# Altium PCB POT 10x8.PcbDoc (part 1 of 4)
Units mm, origin at the board's own origin, x right, y up, seen from the top; angles counter-clockwise.
Board outline 152.4 x 101.6 mm, 4 copper layers (Top Layer, Mid Layer 1, Mid Layer 2, Bottom Layer), stack 0.97 mm thick; 324 components, 355 nets, 1533 pads, 300 vias.
Unrouted connection lines stored in the file: 224.
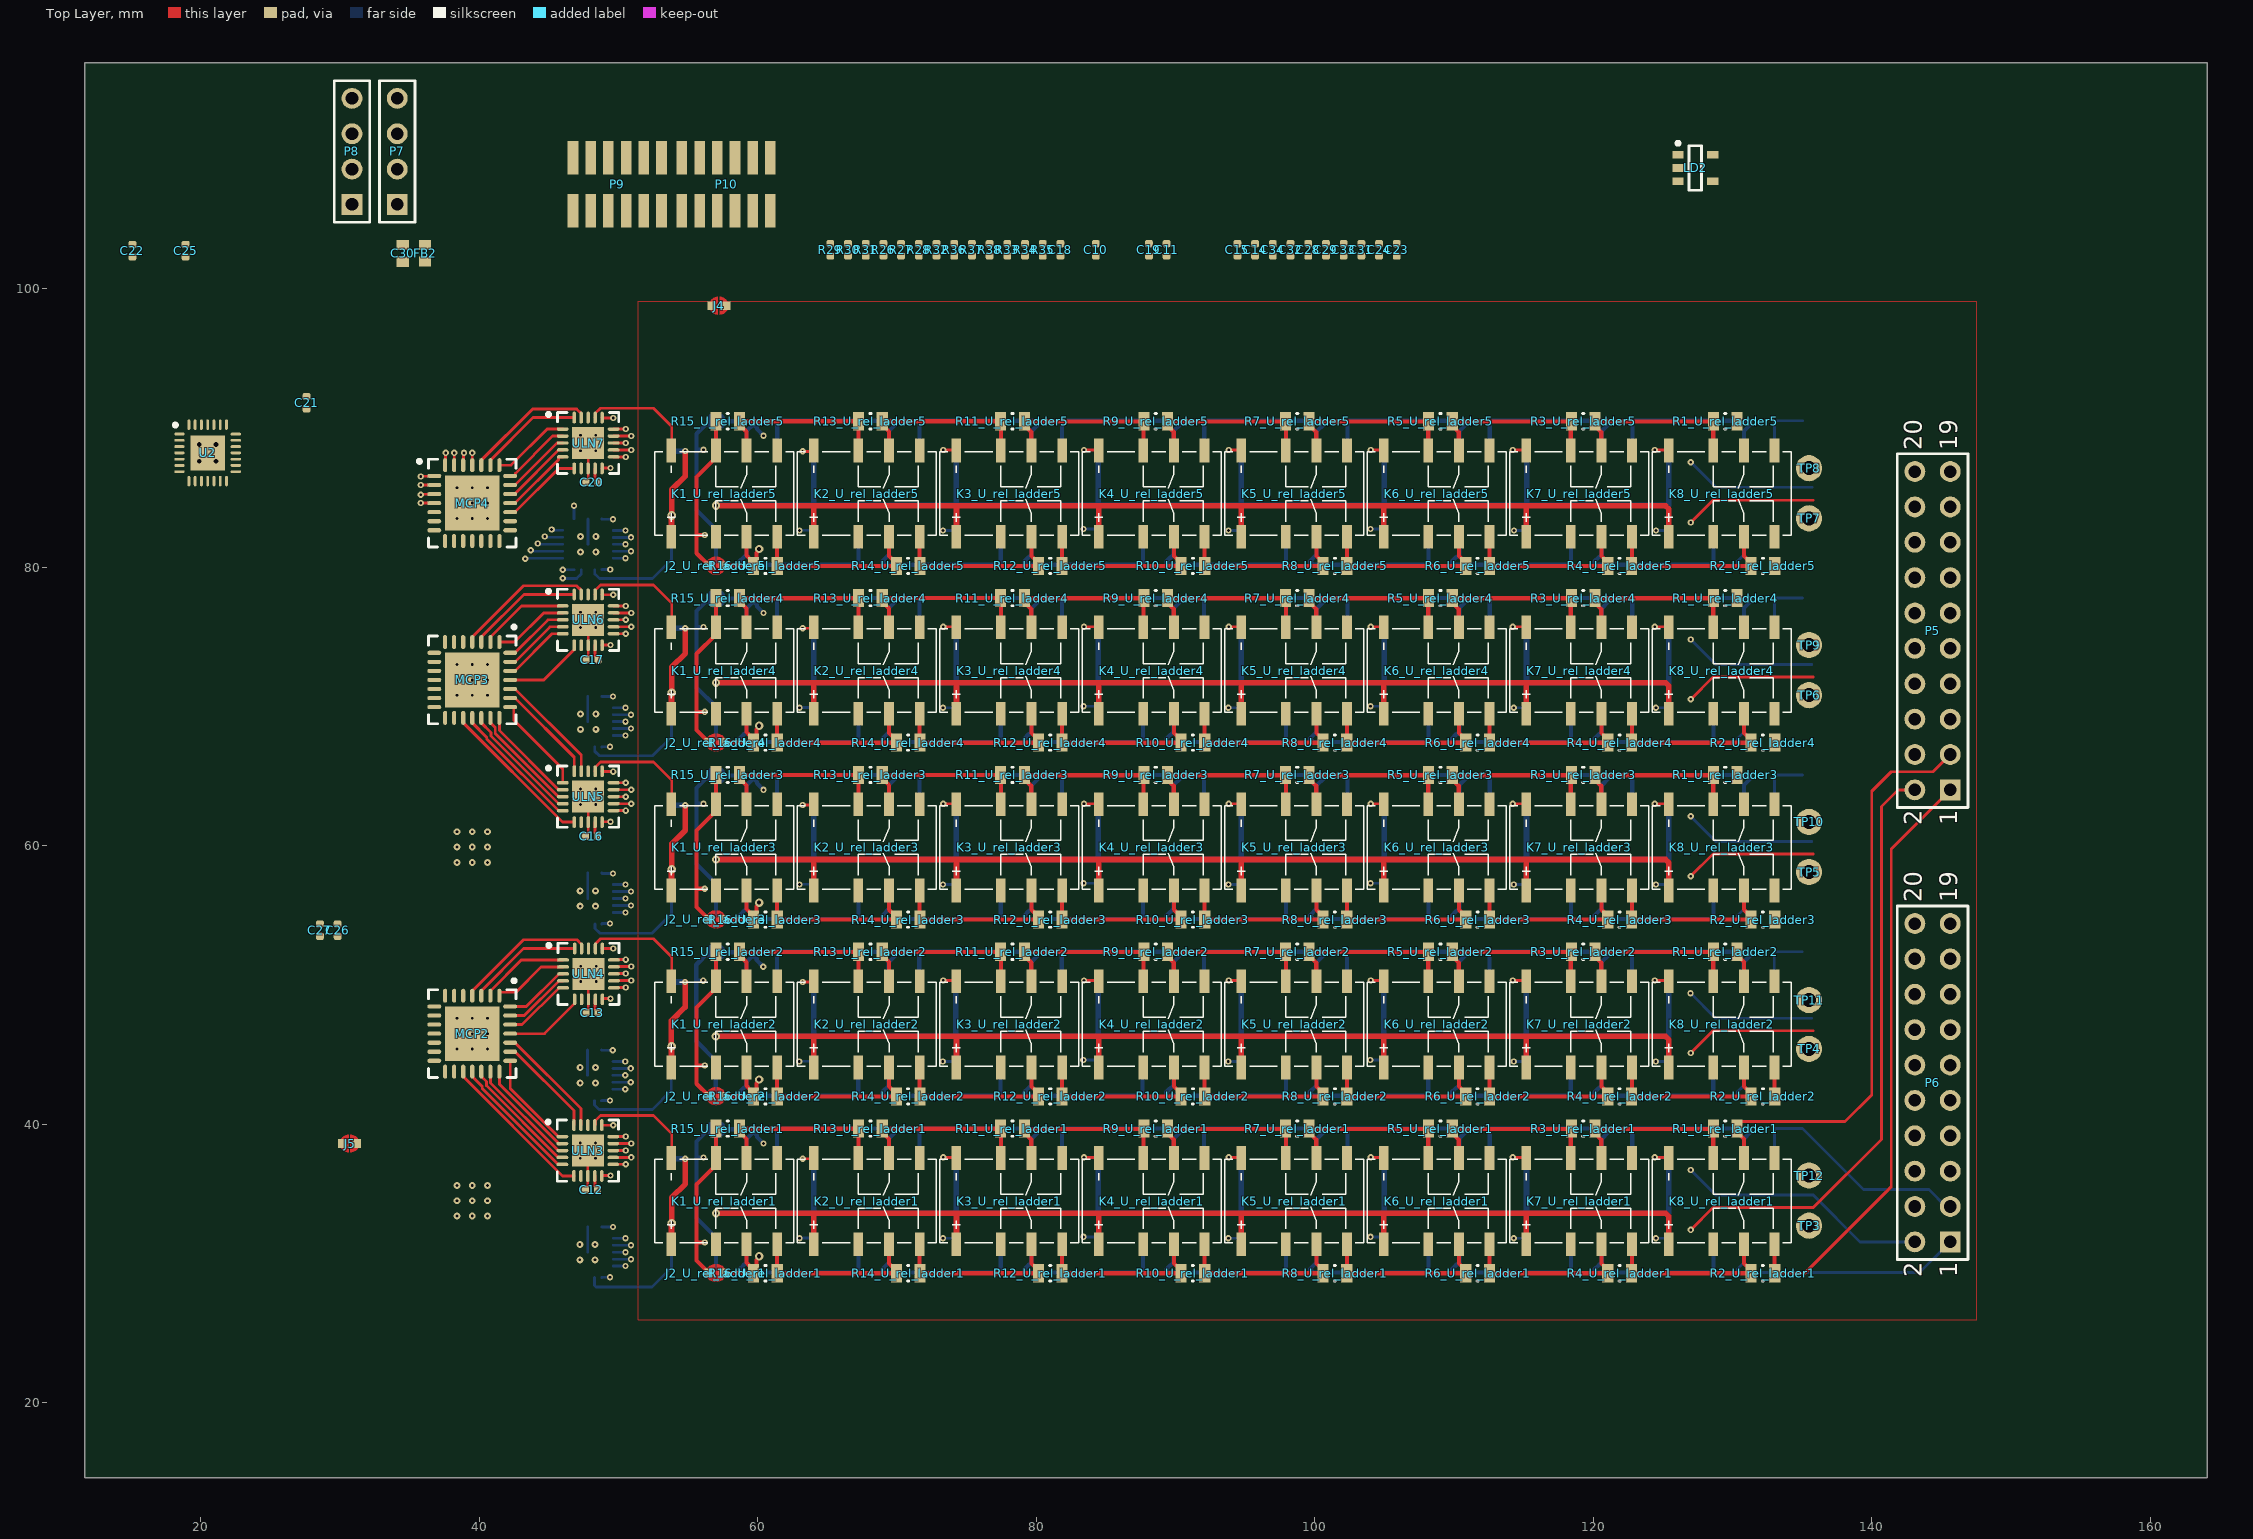
[diagram p0: Top Layer view]
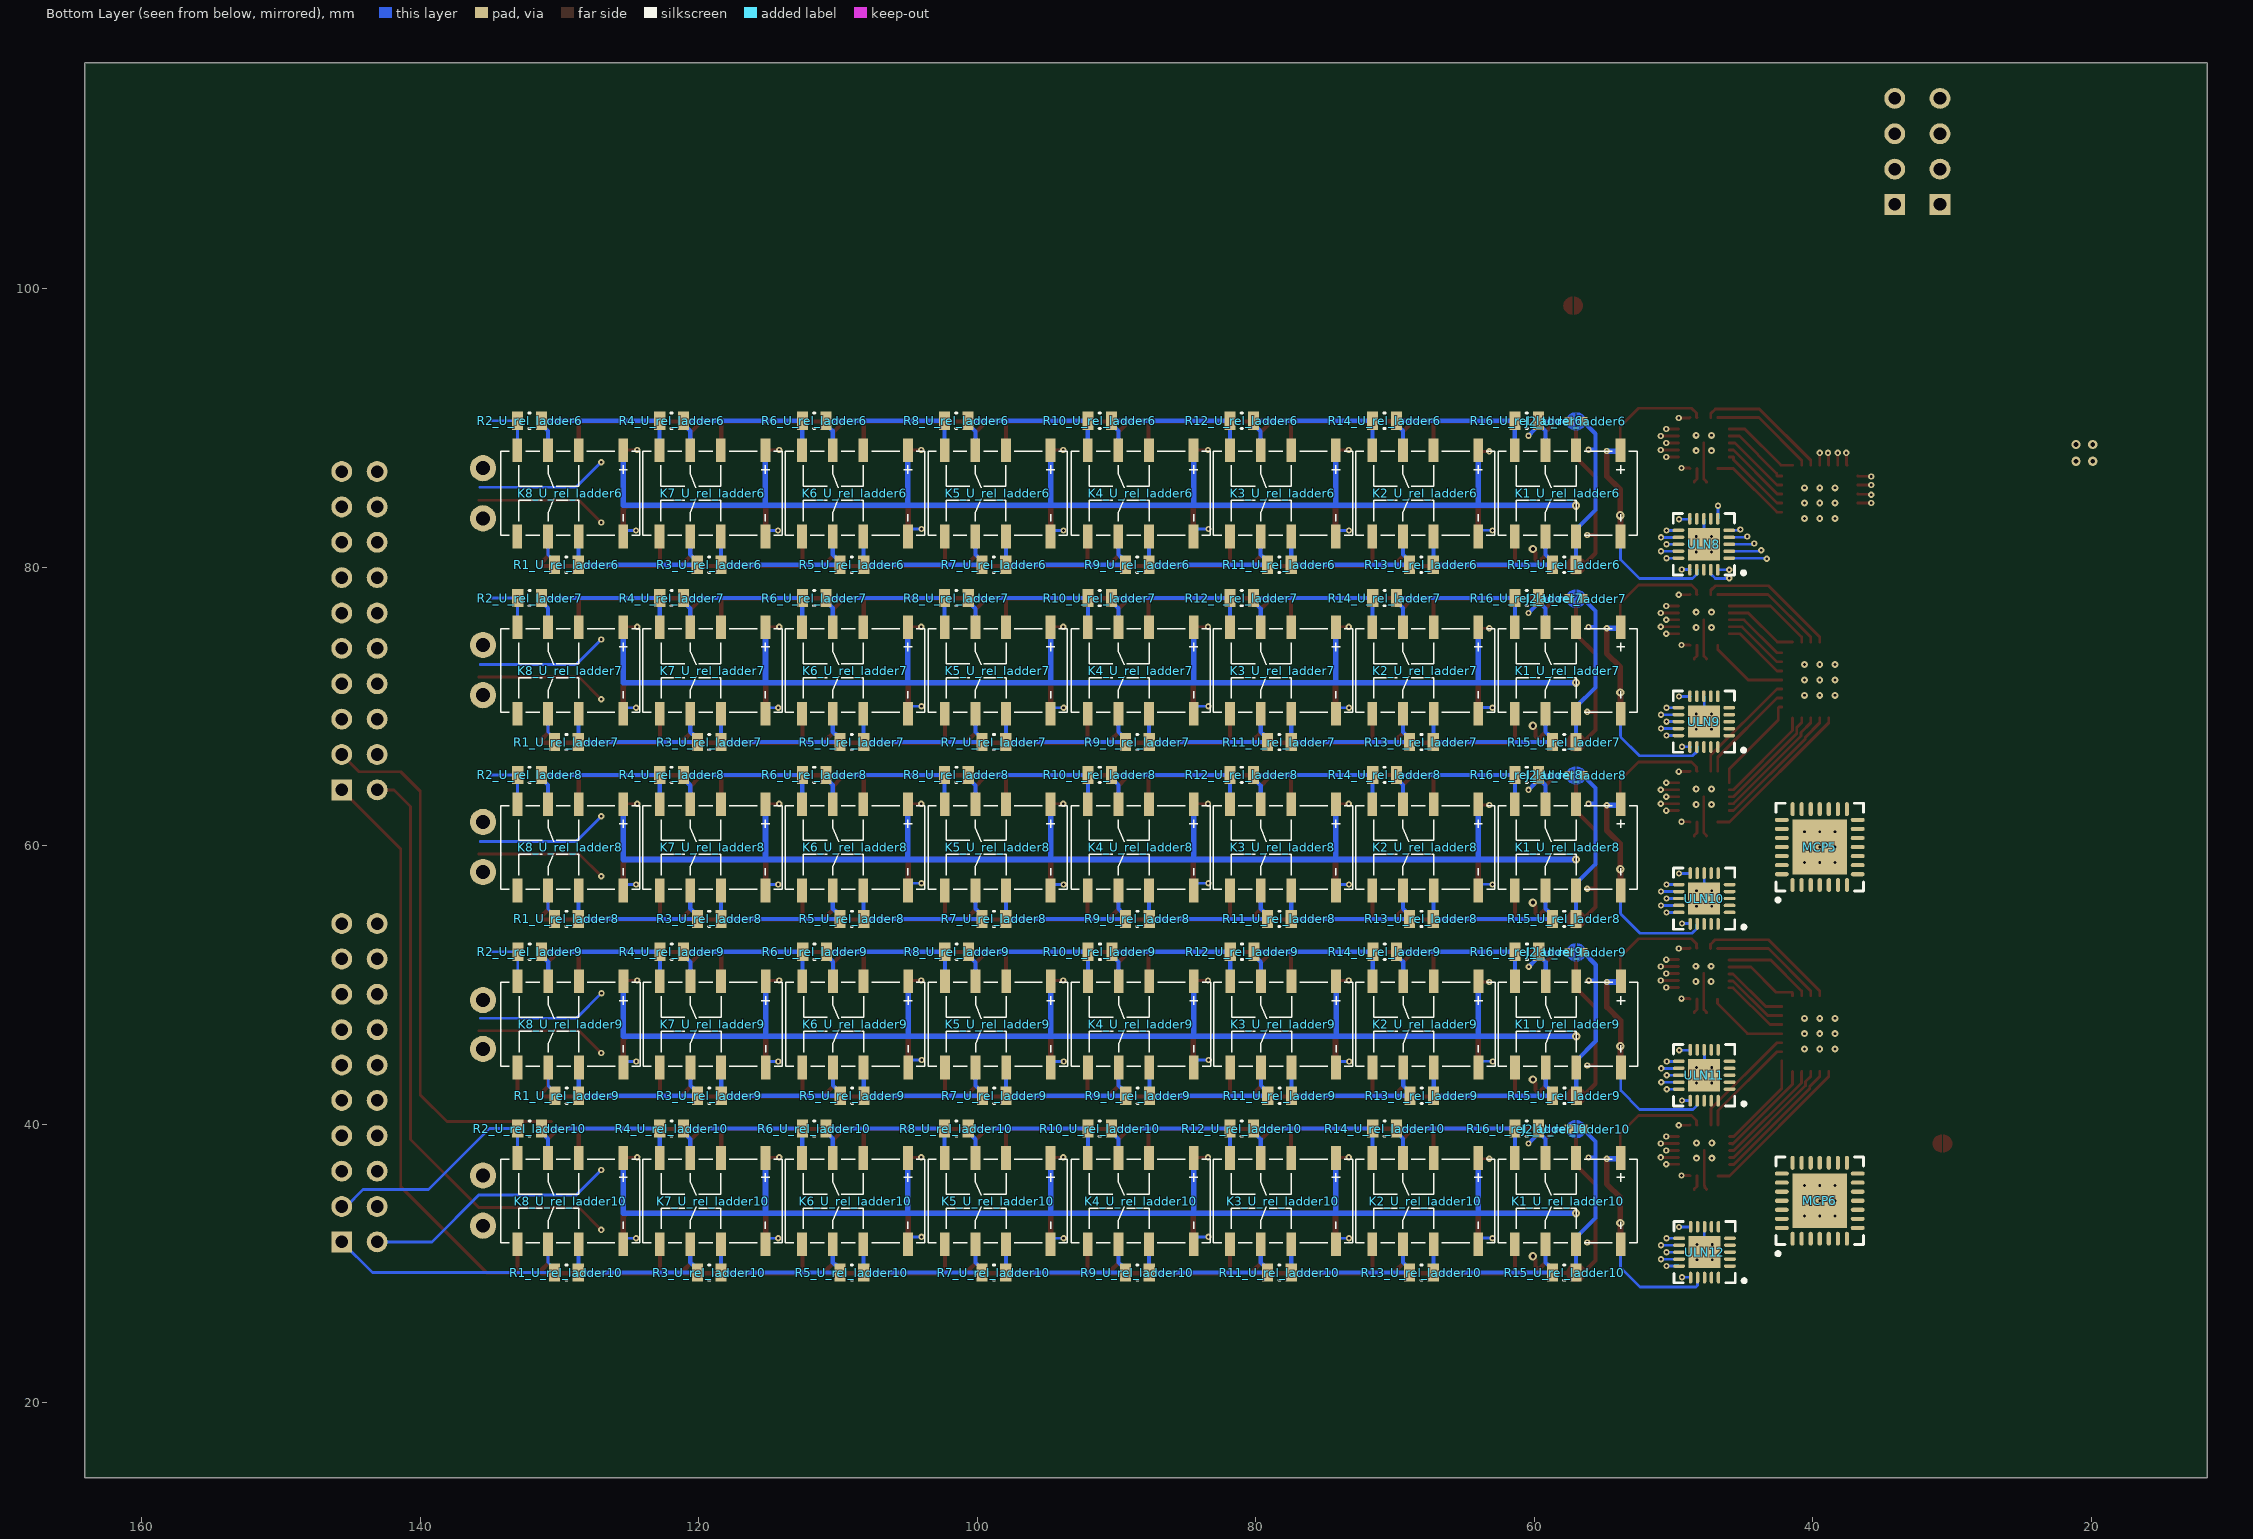
[diagram p1: Bottom Layer view, seen from below]
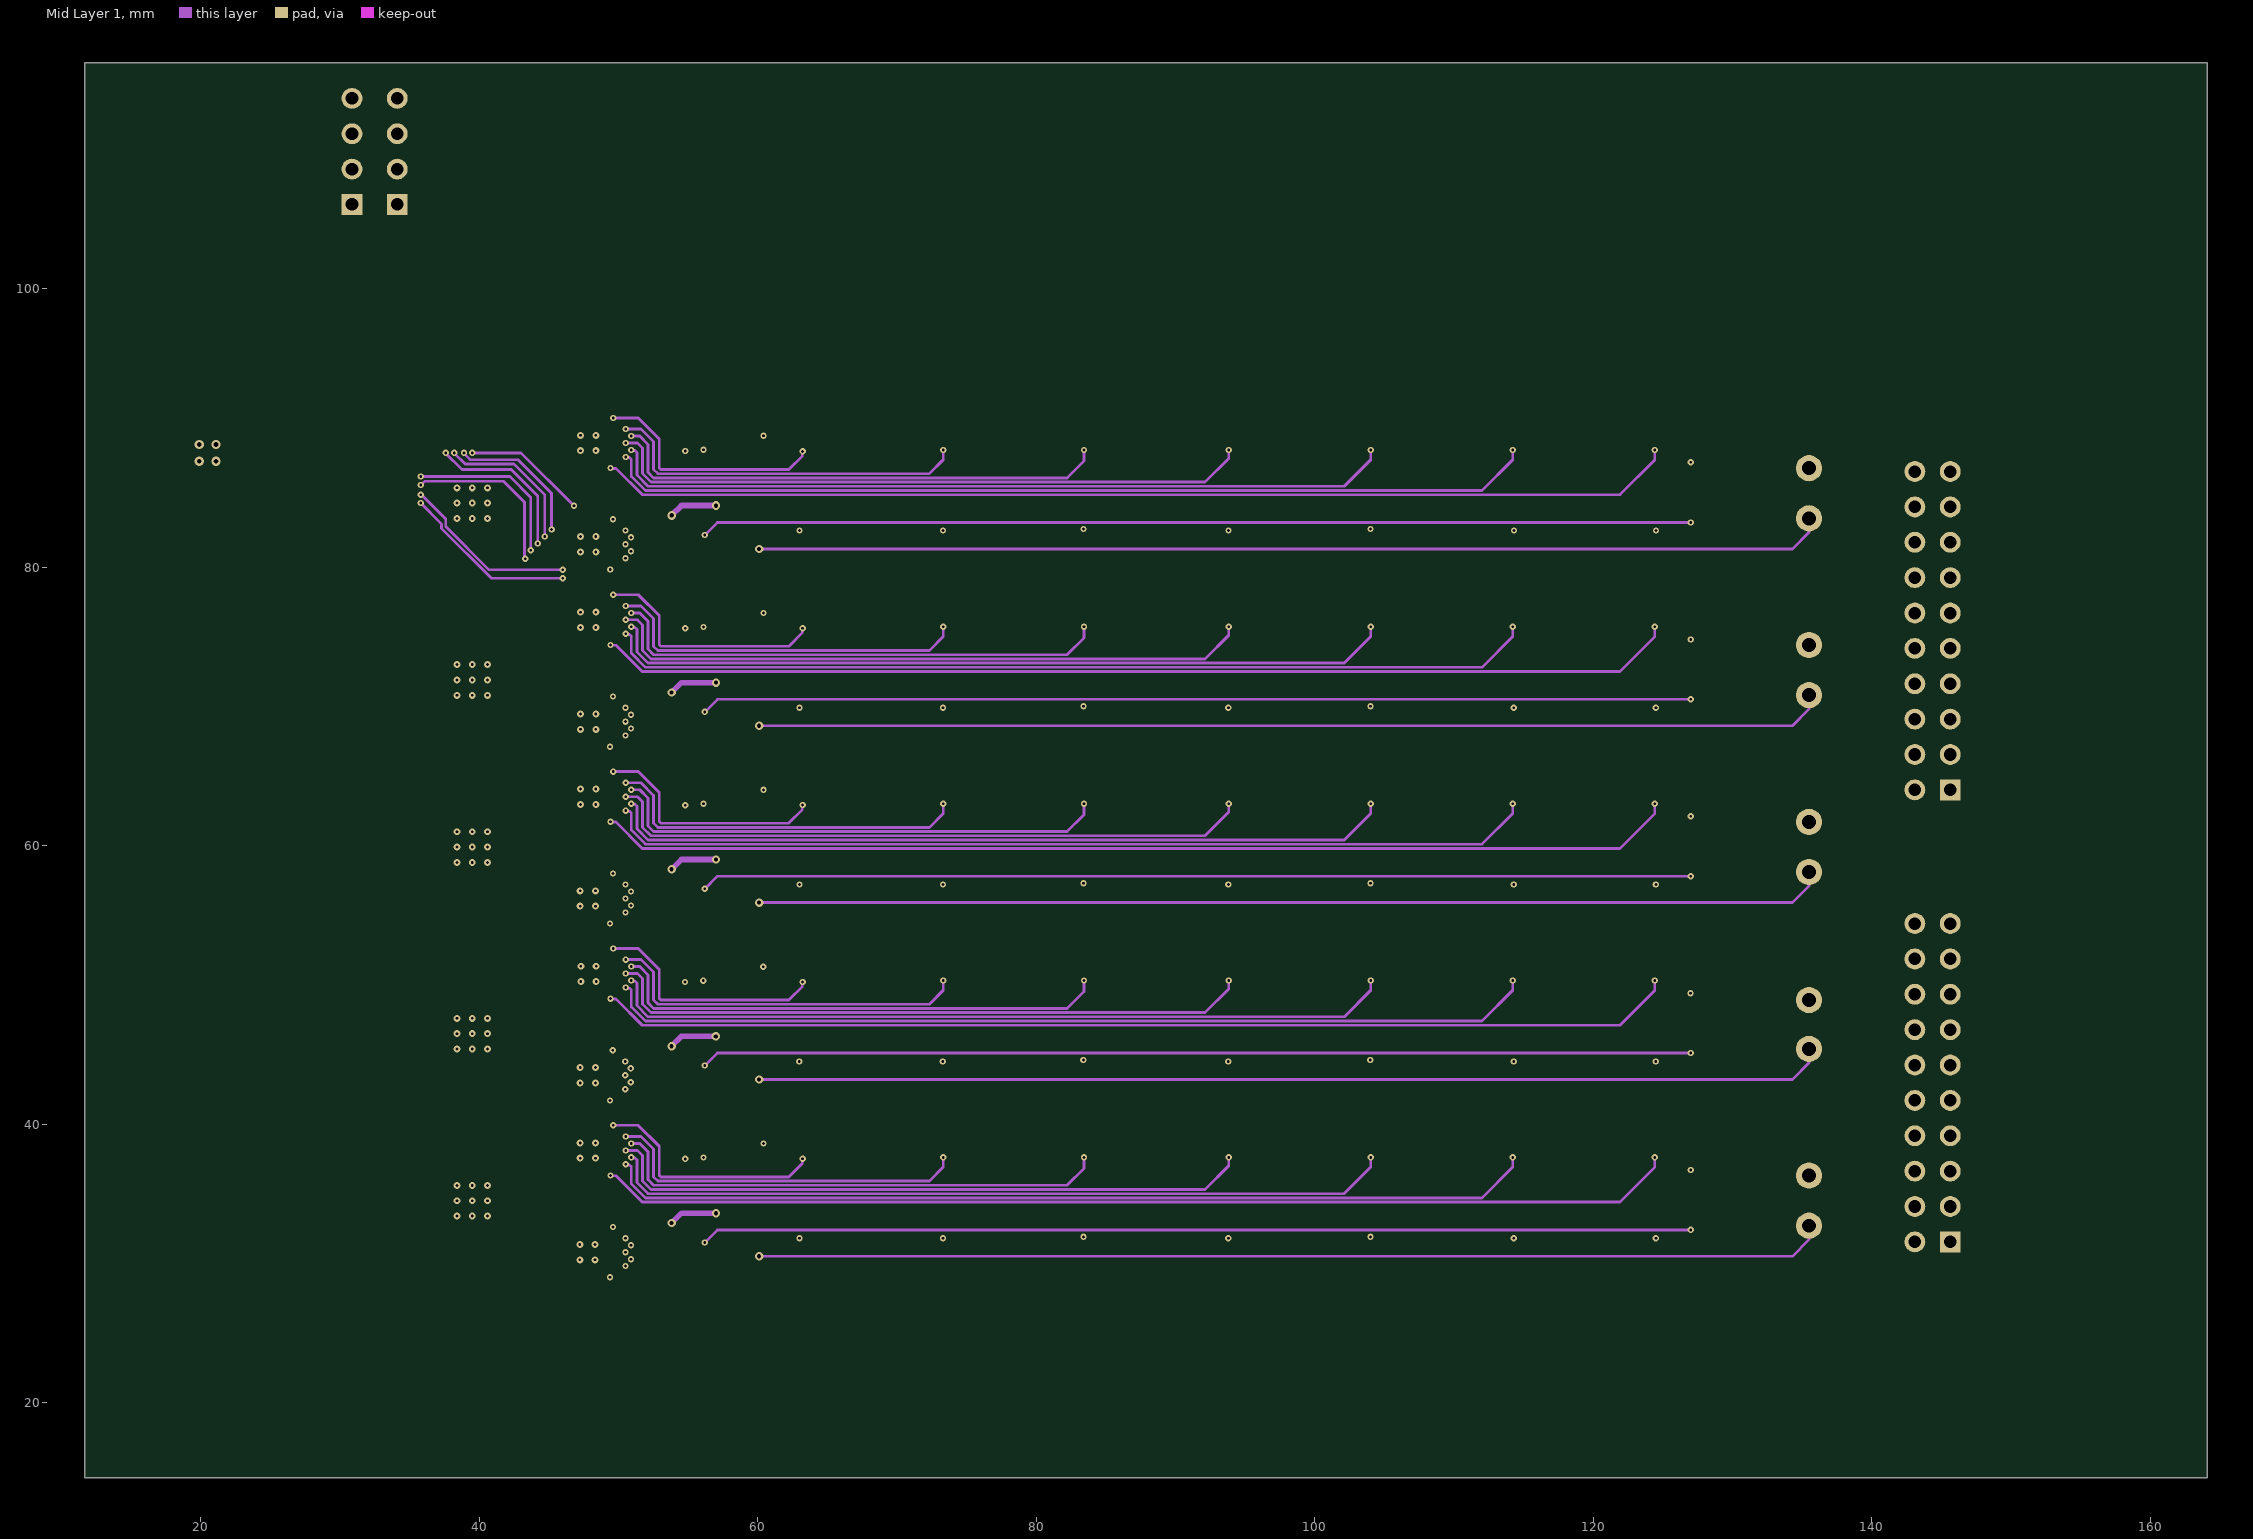
[diagram p2: Mid Layer 1]
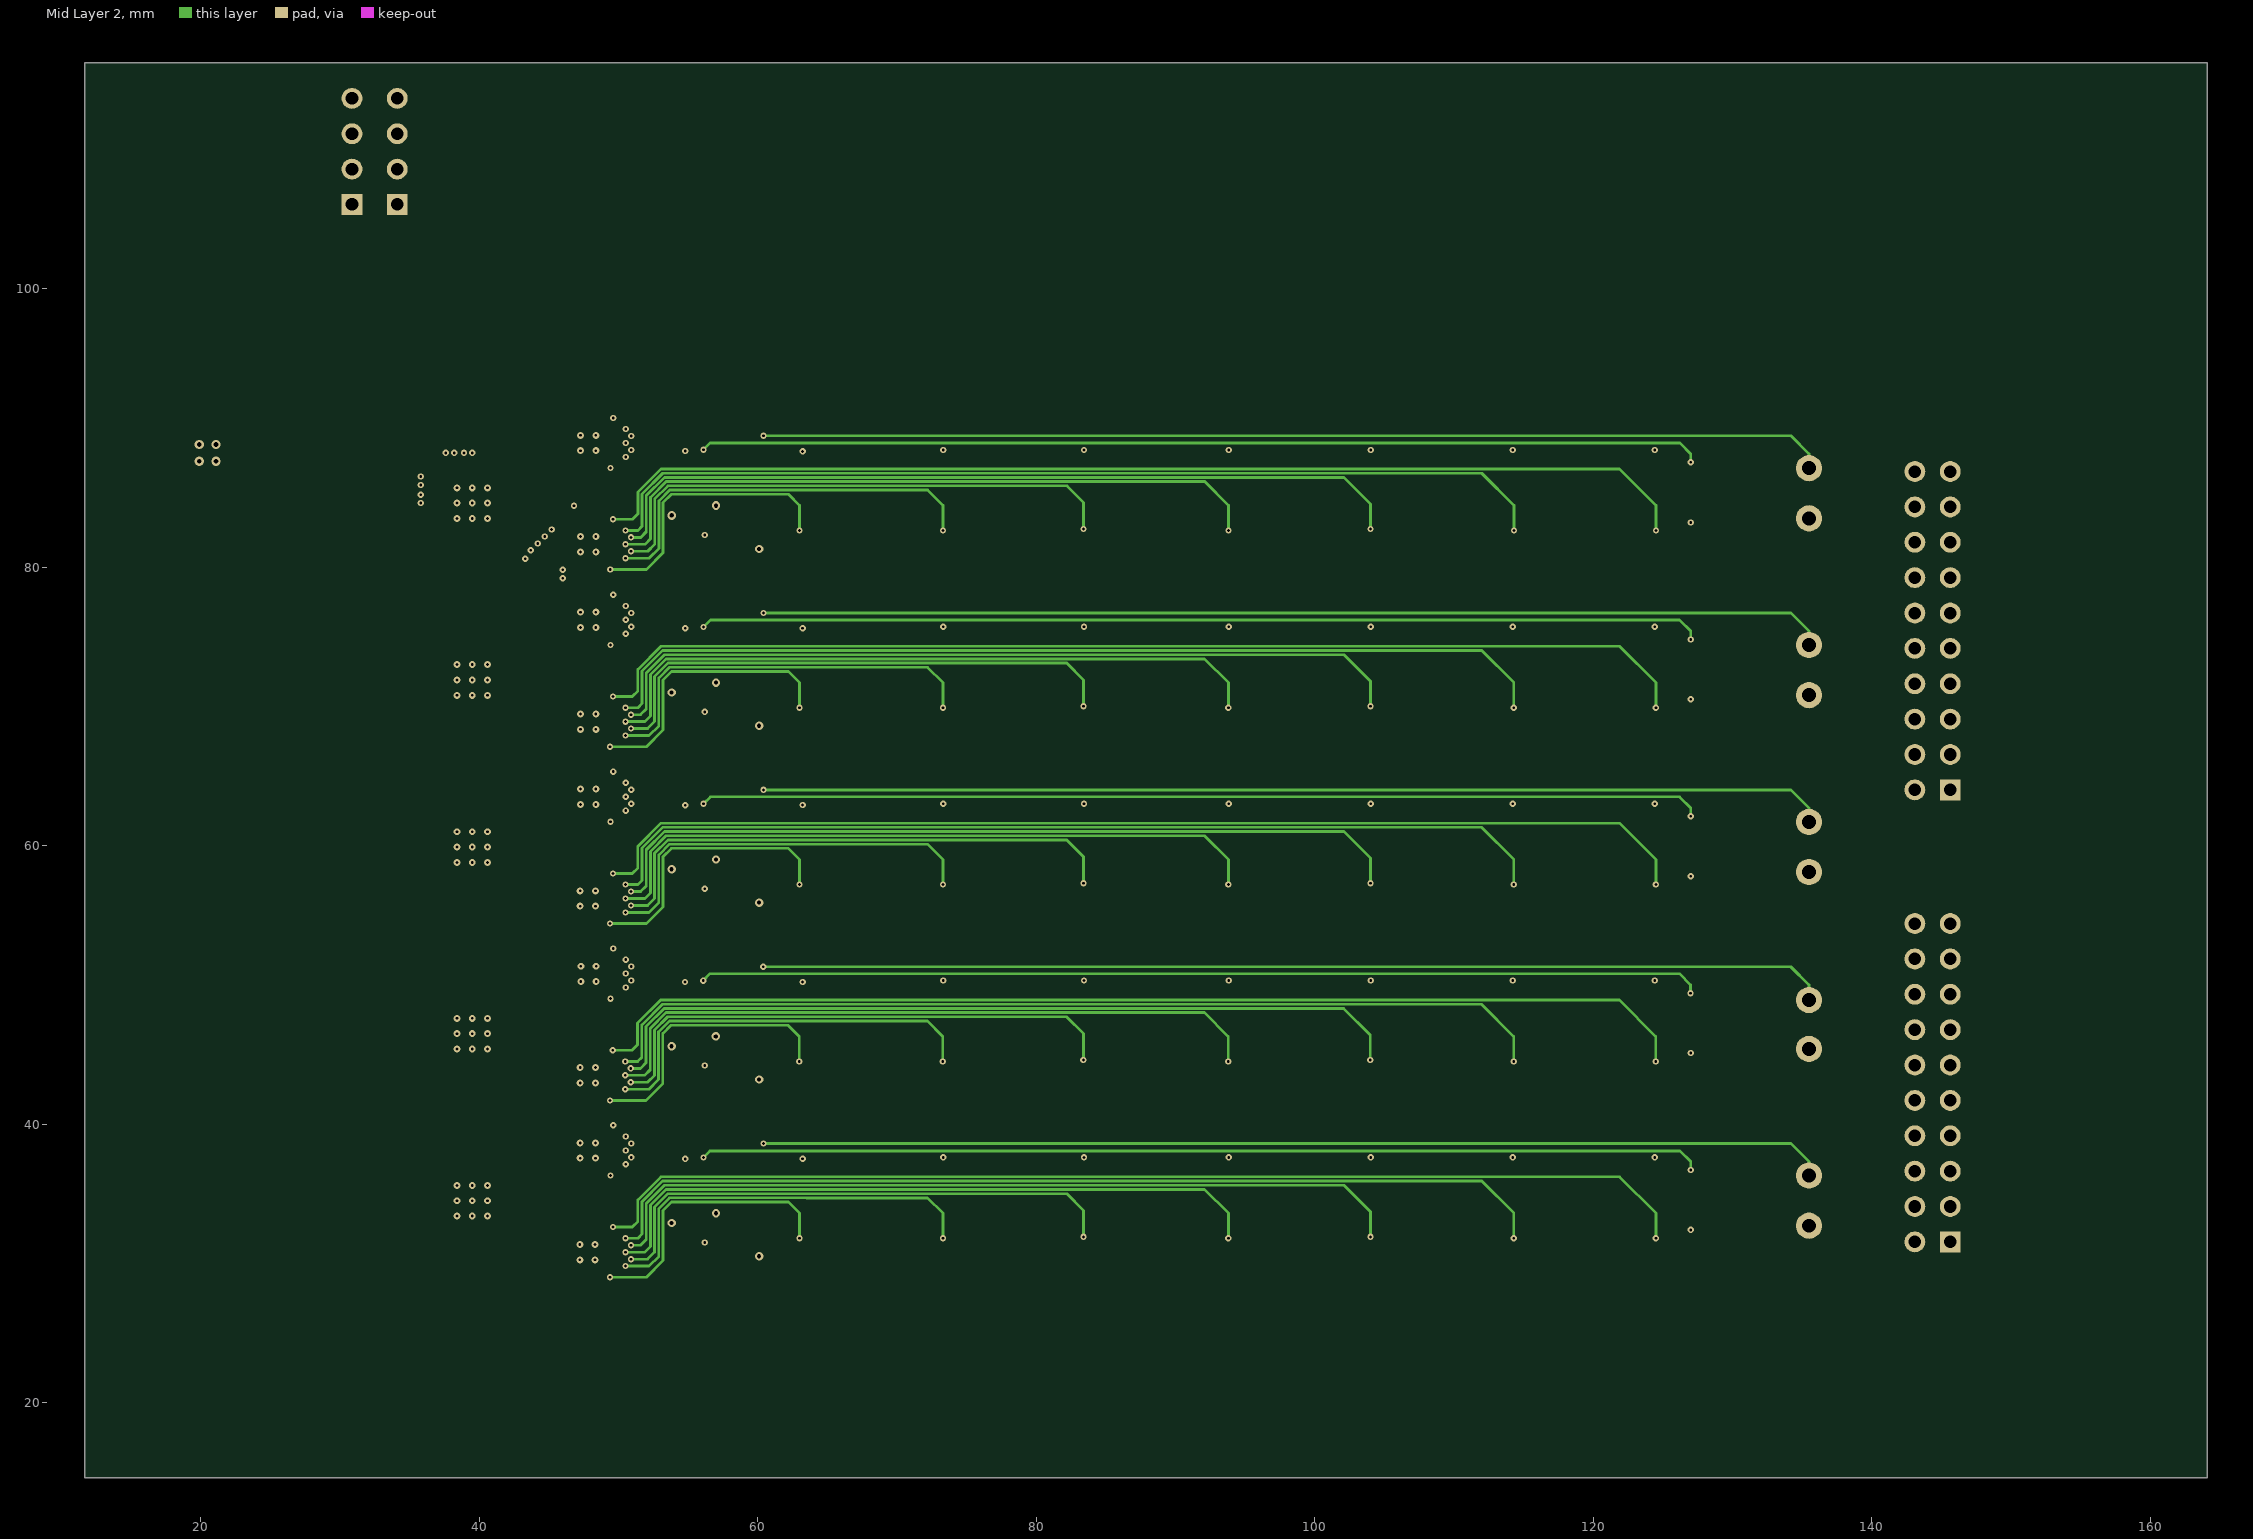
[diagram p3: Mid Layer 2]
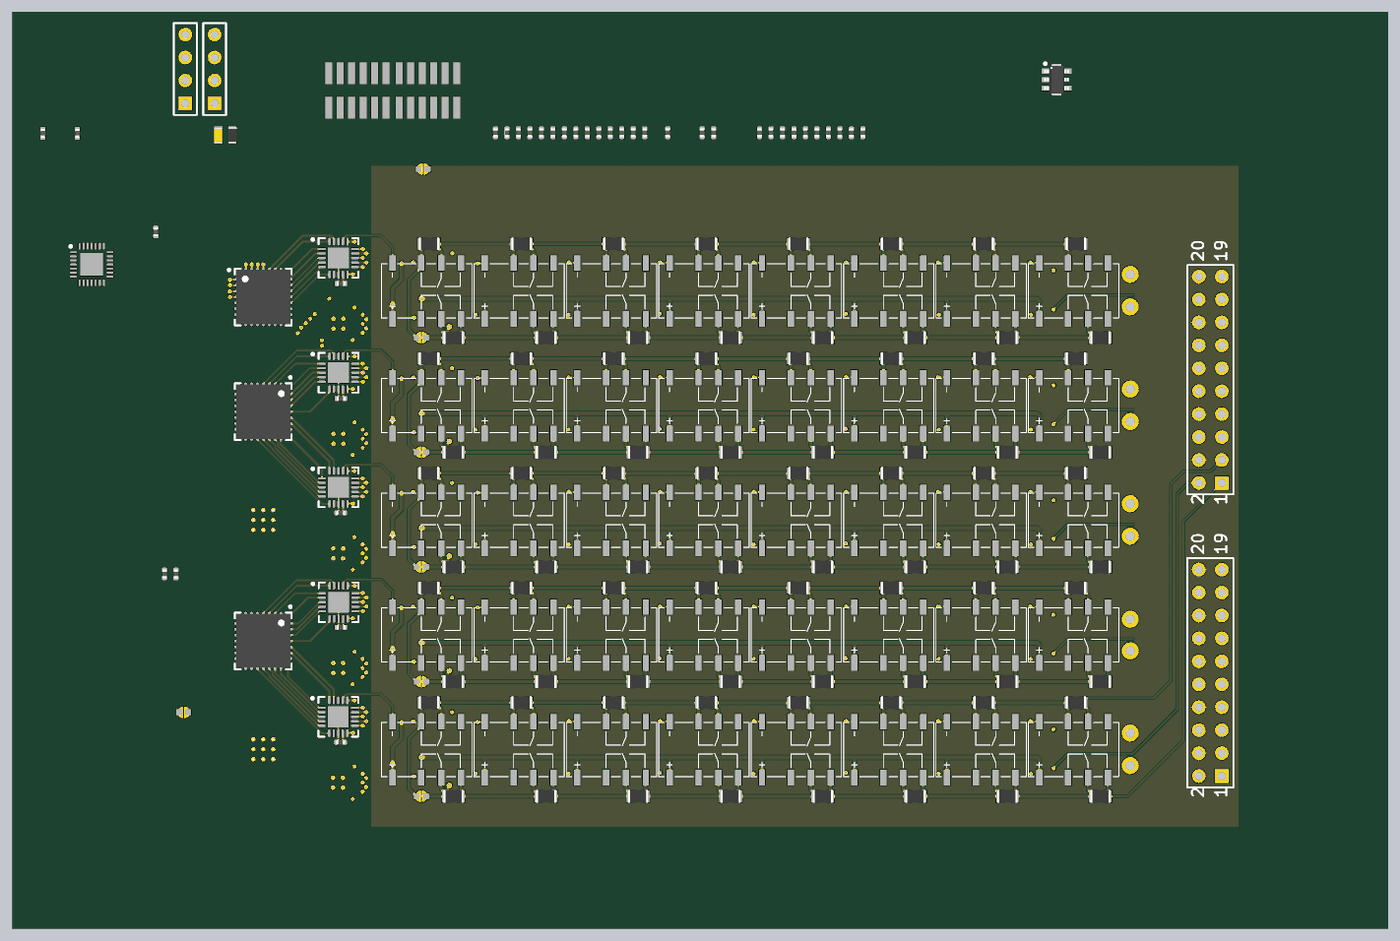
[diagram p7: 3D render of the assembled board from above, using the file's embedded part models]
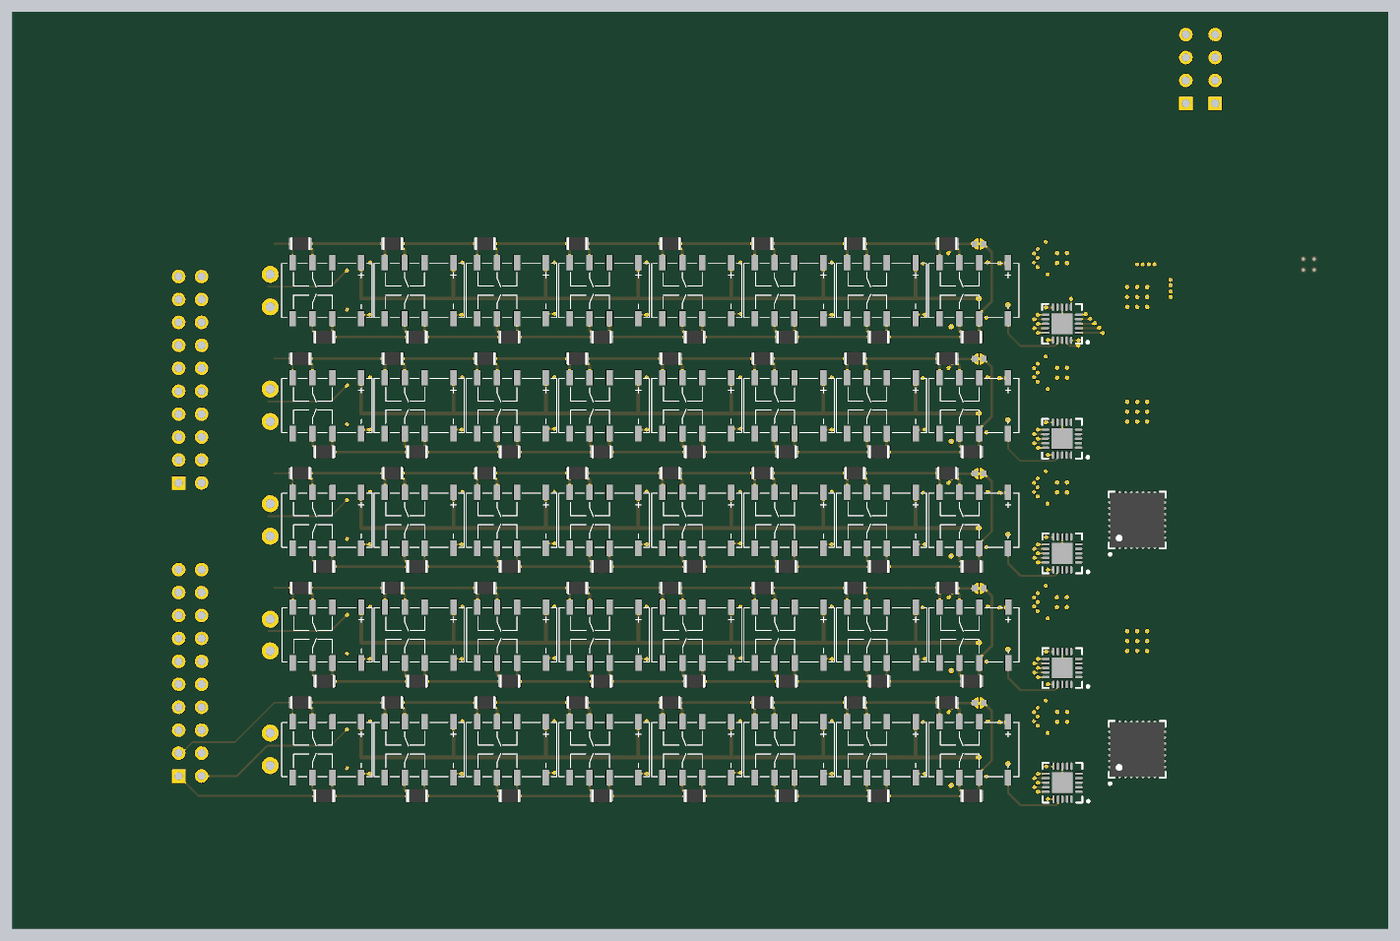
[diagram p8: 3D render of the assembled board from below, using the file's embedded part models]

## Layer stack, top to bottom
Top Solder: solder mask 0.0127, Solder Resist, Dk 3.8
Top Layer: signal copper 0.035
Dielectric 1: prepreg 0.1, 2313, Dk 4.05
Mid Layer 1: signal copper 0.0175
Core: core 0.665, FR-4, Dk 4.5
Mid Layer 2: signal copper 0.0175
Dielectric 2: prepreg 0.1, 2313, Dk 4.05
Bottom Layer: signal copper 0.035
Bottom Solder: solder mask 0.0127, Solder Resist, Dk 3.8

## Board outline
11.684,14.605 164.084,14.605 164.084,116.205 11.684,116.205

## Design rules (kind name [scope] priority, off if disabled: settings)
BoardOutlineClearance [All] p1: gap=0.2 ignorepadtopadclearanceinfootprint=FALSE
Clearance [All] p1: gap=0.102 ignorepadtopadclearanceinfootprint=FALSE except(0.127: Arc-Via Track-Via SMDPad-Via THPad-Via Via-Via Via-Fill Via-Poly Via-Region Via-Text; 0.25: Arc-Hole Track-Hole SMDPad-Hole THPad-Hole Via-Hole Fill-Hole Poly-Hole Region-Hole Text-Hole)
ComponentClearance [All] p1: gap=0.102 collisioncheckmode=3 verticalgap=0.102 showdistances=TRUE
DiffPairsRouting [All] p1: maxlimit=0.102 minlimit=0.102 mostfreqgap=0.102 toplayer_minwidth=0.102 toplayer_maxwidth=1816.048 toplayer_prefwidth=0.102 midlayer1_minwidth=0.102 midlayer1_maxwidth=1816.048 midlayer1_prefwidth=0.102 midlayer2_minwidth=0.102 midlayer2_maxwidth=1816.048 midlayer2_prefwidth=0.102 bottomlayer_minwidth=0.102 bottomlayer_maxwidth=1816.048 bottomlayer_prefwidth=0.102 maxuncoupledlength=12.7
Height [All] p1: minheight=0 maxheight=1816.048 prefheight=12.7
HoleSize [All] p1: absolutevalues=TRUE maxlimit=6.3 minlimit=0.2 maxpercent=80.000 minpercent=20.000
HoleToHoleClearance [All] p1: gap=0.25 allowstackedmicrovias=FALSE
MinimumAnnularRing [All] p1: minimumring=0.076
MinimumSolderMaskSliver [All] p1: minsoldermaskwidth=0
PlaneClearance [All] p1: clearance=0.102
PlaneConnect PlaneConnectPowerPads [InPadClass('PowerPads')] p1: planeconnectstyle=Direct reliefexpansion=0.508 reliefentries=4 reliefconductorwidth=0.254 reliefairgap=0.254
PlaneConnect [All] p2: pad.planeconnectstyle=Relief pad.reliefexpansion=0.3 pad.reliefentries=4 pad.reliefconductorwidth=0.102 pad.reliefairgap=0.102 via.planeconnectstyle=Direct via.reliefexpansion=0.3 via.reliefentries=4 via.reliefconductorwidth=0.127 via.reliefairgap=0.127
PolygonConnect PolygonConnectPowerPads [All vs (InPadClass('PowerPads'))] p1: connectstyle=Direct reliefconductorwidth=0.254 reliefentries=4 polygonreliefangle="90 Angle" airgapwidth=0.254
PolygonConnect [All] p2: thpad.connectstyle=Relief thpad.reliefconductorwidth=0.102 thpad.reliefentries=4 thpad.polygonreliefangle="90 Angle" thpad.airgapwidth=0.102 smdpad.connectstyle=Relief smdpad.reliefconductorwidth=0.102 smdpad.reliefentries=4 smdpad.polygonreliefangle="90 Angle" smdpad.airgapwidth=0.102 via.connectstyle=Direct via.reliefconductorwidth=0.127 via.reliefentries=4 via.polygonreliefangle="90 Angle" via.airgapwidth=0.127
RoomDefinition U_rel_ladder10 [InComponentClass('U_rel_ladder10')] p1: confinementstyle=ConfineIn formatcopy=TRUE lockcomponents=FALSE outline 43.4,28.1 136.8,28.1 136.8,40.8 43.4,40.8
RoomDefinition U_rel_ladder8 [InComponentClass('U_rel_ladder8')] p2: confinementstyle=ConfineIn formatcopy=TRUE lockcomponents=FALSE outline 43.4,53.5 136.8,53.5 136.8,66.2 43.4,66.2
RoomDefinition U_rel_ladder7 [InComponentClass('U_rel_ladder7')] p3: confinementstyle=ConfineIn formatcopy=TRUE lockcomponents=FALSE outline 43.4,66.2 136.8,66.2 136.8,78.9 43.4,78.9
RoomDefinition U_rel_ladder6 [InComponentClass('U_rel_ladder6')] p4: confinementstyle=ConfineIn formatcopy=TRUE lockcomponents=FALSE outline 43.404,78.932 136.804,78.932 136.804,91.632 43.404,91.632
RoomDefinition U_rel_ladder9 [InComponentClass('U_rel_ladder9')] p5: confinementstyle=ConfineIn formatcopy=TRUE lockcomponents=FALSE outline 43.386,40.8 136.786,40.8 136.786,53.5 43.386,53.5
RoomDefinition U_rel_ladder5 [InComponentClass('U_rel_ladder5')] p6: confinementstyle=ConfineIn formatcopy=FALSE lockcomponents=FALSE outline 43.4,78.9 136.8,78.9 136.8,91.6 43.4,91.6
RoomDefinition U_rel_ladder4 [InComponentClass('U_rel_ladder4')] p7: confinementstyle=ConfineIn formatcopy=FALSE lockcomponents=FALSE outline 43.4,66.2 136.8,66.2 136.8,78.9 43.4,78.9
RoomDefinition U_rel_ladder3 [InComponentClass('U_rel_ladder3')] p8: confinementstyle=ConfineIn formatcopy=FALSE lockcomponents=FALSE outline 43.4,53.5 136.8,53.5 136.8,66.2 43.4,66.2
RoomDefinition U_rel_ladder2 [InComponentClass('U_rel_ladder2')] p9: confinementstyle=ConfineIn formatcopy=FALSE lockcomponents=FALSE outline 43.4,40.8 136.8,40.8 136.8,53.5 43.4,53.5
RoomDefinition U_rel_ladder1 [InComponentClass('U_rel_ladder1')] p10: confinementstyle=ConfineIn formatcopy=FALSE lockcomponents=FALSE outline 43.4,28.1 136.8,28.1 136.8,40.8 43.4,40.8
RoutingVias [All] p1: holewidth=0.2 width=0.45 viastyle="Through Hole" minholewidth=0.2 minwidth=0.45 maxholewidth=6.3 maxwidth=6.55
SilkToSilkClearance [All] p1: silktosilkclearance=0
SilkToSolderMaskClearance [IsPad] p1: minsilkscreentomaskgap=0.102 clearancetoexposedcopper=TRUE
SolderMaskExpansion [All] p1: expansion=0.075 istentingtop=FALSE
Width [All] p1: maxlimit=1816.048 minlimit=0.102 preferedwidth=0.102
20 further rules are at their usual default settings.

## Classes and differential pairs
channel class rel_ladder: U_rel_ladder1 U_rel_ladder2 U_rel_ladder3 U_rel_ladder4 U_rel_ladder5 U_rel_ladder6 U_rel_ladder7 U_rel_ladder8 U_rel_ladder9 U_rel_ladder10
component class U_rel_ladder10: J2_U_rel_ladder10 K1_U_rel_ladder10 K2_U_rel_ladder10 K3_U_rel_ladder10 K4_U_rel_ladder10 K5_U_rel_ladder10 K6_U_rel_ladder10 K7_U_rel_ladder10 K8_U_rel_ladder10 R1_U_rel_ladder10 R2_U_rel_ladder10 R3_U_rel_ladder10 R4_U_rel_ladder10 R5_U_rel_ladder10 R6_U_rel_ladder10 R7_U_rel_ladder10 R8_U_rel_ladder10 R9_U_rel_ladder10 R10_U_rel_ladder10 R11_U_rel_ladder10 R12_U_rel_ladder10 R13_U_rel_ladder10 R14_U_rel_ladder10 R15_U_rel_ladder10 R16_U_rel_ladder10
component class U_rel_ladder9: J2_U_rel_ladder9 K1_U_rel_ladder9 K2_U_rel_ladder9 K3_U_rel_ladder9 K4_U_rel_ladder9 K5_U_rel_ladder9 K6_U_rel_ladder9 K7_U_rel_ladder9 K8_U_rel_ladder9 R1_U_rel_ladder9 R2_U_rel_ladder9 R3_U_rel_ladder9 R4_U_rel_ladder9 R5_U_rel_ladder9 R6_U_rel_ladder9 R7_U_rel_ladder9 R8_U_rel_ladder9 R9_U_rel_ladder9 R10_U_rel_ladder9 R11_U_rel_ladder9 R12_U_rel_ladder9 R13_U_rel_ladder9 R14_U_rel_ladder9 R15_U_rel_ladder9 R16_U_rel_ladder9
component class U_rel_ladder8: J2_U_rel_ladder8 K1_U_rel_ladder8 K2_U_rel_ladder8 K3_U_rel_ladder8 K4_U_rel_ladder8 K5_U_rel_ladder8 K6_U_rel_ladder8 K7_U_rel_ladder8 K8_U_rel_ladder8 R1_U_rel_ladder8 R2_U_rel_ladder8 R3_U_rel_ladder8 R4_U_rel_ladder8 R5_U_rel_ladder8 R6_U_rel_ladder8 R7_U_rel_ladder8 R8_U_rel_ladder8 R9_U_rel_ladder8 R10_U_rel_ladder8 R11_U_rel_ladder8 R12_U_rel_ladder8 R13_U_rel_ladder8 R14_U_rel_ladder8 R15_U_rel_ladder8 R16_U_rel_ladder8
component class U_rel_ladder7: J2_U_rel_ladder7 K1_U_rel_ladder7 K2_U_rel_ladder7 K3_U_rel_ladder7 K4_U_rel_ladder7 K5_U_rel_ladder7 K6_U_rel_ladder7 K7_U_rel_ladder7 K8_U_rel_ladder7 R1_U_rel_ladder7 R2_U_rel_ladder7 R3_U_rel_ladder7 R4_U_rel_ladder7 R5_U_rel_ladder7 R6_U_rel_ladder7 R7_U_rel_ladder7 R8_U_rel_ladder7 R9_U_rel_ladder7 R10_U_rel_ladder7 R11_U_rel_ladder7 R12_U_rel_ladder7 R13_U_rel_ladder7 R14_U_rel_ladder7 R15_U_rel_ladder7 R16_U_rel_ladder7
component class U_rel_ladder6: J2_U_rel_ladder6 K1_U_rel_ladder6 K2_U_rel_ladder6 K3_U_rel_ladder6 K4_U_rel_ladder6 K5_U_rel_ladder6 K6_U_rel_ladder6 K7_U_rel_ladder6 K8_U_rel_ladder6 R1_U_rel_ladder6 R2_U_rel_ladder6 R3_U_rel_ladder6 R4_U_rel_ladder6 R5_U_rel_ladder6 R6_U_rel_ladder6 R7_U_rel_ladder6 R8_U_rel_ladder6 R9_U_rel_ladder6 R10_U_rel_ladder6 R11_U_rel_ladder6 R12_U_rel_ladder6 R13_U_rel_ladder6 R14_U_rel_ladder6 R15_U_rel_ladder6 R16_U_rel_ladder6
component class U_rel_ladder5: J2_U_rel_ladder5 K1_U_rel_ladder5 K2_U_rel_ladder5 K3_U_rel_ladder5 K4_U_rel_ladder5 K5_U_rel_ladder5 K6_U_rel_ladder5 K7_U_rel_ladder5 K8_U_rel_ladder5 R1_U_rel_ladder5 R2_U_rel_ladder5 R3_U_rel_ladder5 R4_U_rel_ladder5 R5_U_rel_ladder5 R6_U_rel_ladder5 R7_U_rel_ladder5 R8_U_rel_ladder5 R9_U_rel_ladder5 R10_U_rel_ladder5 R11_U_rel_ladder5 R12_U_rel_ladder5 R13_U_rel_ladder5 R14_U_rel_ladder5 R15_U_rel_ladder5 R16_U_rel_ladder5
component class U_rel_ladder4: J2_U_rel_ladder4 K1_U_rel_ladder4 K2_U_rel_ladder4 K3_U_rel_ladder4 K4_U_rel_ladder4 K5_U_rel_ladder4 K6_U_rel_ladder4 K7_U_rel_ladder4 K8_U_rel_ladder4 R1_U_rel_ladder4 R2_U_rel_ladder4 R3_U_rel_ladder4 R4_U_rel_ladder4 R5_U_rel_ladder4 R6_U_rel_ladder4 R7_U_rel_ladder4 R8_U_rel_ladder4 R9_U_rel_ladder4 R10_U_rel_ladder4 R11_U_rel_ladder4 R12_U_rel_ladder4 R13_U_rel_ladder4 R14_U_rel_ladder4 R15_U_rel_ladder4 R16_U_rel_ladder4
component class U_rel_ladder3: J2_U_rel_ladder3 K1_U_rel_ladder3 K2_U_rel_ladder3 K3_U_rel_ladder3 K4_U_rel_ladder3 K5_U_rel_ladder3 K6_U_rel_ladder3 K7_U_rel_ladder3 K8_U_rel_ladder3 R1_U_rel_ladder3 R2_U_rel_ladder3 R3_U_rel_ladder3 R4_U_rel_ladder3 R5_U_rel_ladder3 R6_U_rel_ladder3 R7_U_rel_ladder3 R8_U_rel_ladder3 R9_U_rel_ladder3 R10_U_rel_ladder3 R11_U_rel_ladder3 R12_U_rel_ladder3 R13_U_rel_ladder3 R14_U_rel_ladder3 R15_U_rel_ladder3 R16_U_rel_ladder3
component class U_rel_ladder2: J2_U_rel_ladder2 K1_U_rel_ladder2 K2_U_rel_ladder2 K3_U_rel_ladder2 K4_U_rel_ladder2 K5_U_rel_ladder2 K6_U_rel_ladder2 K7_U_rel_ladder2 K8_U_rel_ladder2 R1_U_rel_ladder2 R2_U_rel_ladder2 R3_U_rel_ladder2 R4_U_rel_ladder2 R5_U_rel_ladder2 R6_U_rel_ladder2 R7_U_rel_ladder2 R8_U_rel_ladder2 R9_U_rel_ladder2 R10_U_rel_ladder2 R11_U_rel_ladder2 R12_U_rel_ladder2 R13_U_rel_ladder2 R14_U_rel_ladder2 R15_U_rel_ladder2 R16_U_rel_ladder2
component class U_rel_ladder1: J2_U_rel_ladder1 K1_U_rel_ladder1 K2_U_rel_ladder1 K3_U_rel_ladder1 K4_U_rel_ladder1 K5_U_rel_ladder1 K6_U_rel_ladder1 K7_U_rel_ladder1 K8_U_rel_ladder1 R1_U_rel_ladder1 R2_U_rel_ladder1 R3_U_rel_ladder1 R4_U_rel_ladder1 R5_U_rel_ladder1 R6_U_rel_ladder1 R7_U_rel_ladder1 R8_U_rel_ladder1 R9_U_rel_ladder1 R10_U_rel_ladder1 R11_U_rel_ladder1 R12_U_rel_ladder1 R13_U_rel_ladder1 R14_U_rel_ladder1 R15_U_rel_ladder1 R16_U_rel_ladder1
component class "POT 10x8": C10 C11 C12 C13 C14 C15 C16 C17 C18 C19 C20 C21 C22 C23 C24 C25 C26 C27 C28 C29 C30 C31 C32 C33 C34 FB2 J4 J5 LD2 MCP2 MCP3 MCP4 MCP5 MCP6 P5 P6 P7 P8 P9 P10 R26 R27 R28 R29 R30 R31 R32 R33 R34 R35 R36 R37 R38 TP3 TP4 TP5 TP6 TP7 TP8 TP9 TP10 TP11 TP12 U2 ULN3 ULN4 ULN5 ULN6 ULN7 ULN8 ULN9 ULN10 ULN11 ULN12

## Components (designator, comment, footprint, x,y, rotation, side; value= is the part's Value field where it differs from the comment)
C10 "100n" R1005_0402i_L 84.281,102.785 r90 top
C11 "100n" R1005_0402i_L 89.366,102.785 r90 top
C12 "100n" R1005_0402i_L 48.054,35.284 r180 top
C13 "100n" R1005_0402i_L 48.1,48 r180 top
C14 "100n" R1005_0402i_L 95.722,102.785 r90 top
C15 "100n" R1005_0402i_L 94.451,102.785 r90 top
C16 "100n" R1005_0402i_L 48.063,60.681 r180 top
C17 "100n" R1005_0402i_L 48.1,73.355 r180 top
C18 "100n" R1005_0402i_L 81.739,102.785 r90 top
C19 "100n" R1005_0402i_L 88.095,102.785 r90 top
C20 "100n" R1005_0402i_L 48.099,86.086 r180 top
C21 "100n" R1005_0402i_L 27.6,91.8 r90 top
C22 "100n" R1005_0402i_L 15.1,102.724 r90 top
C23 "100n" R1005_0402i_L 105.892,102.785 r90 top
C24 "100n" R1005_0402i_L 104.62,102.785 r90 top
C25 "100n" R1005_0402i_L 18.913,102.724 r90 top
C26 "100n" R1005_0402i_L 29.834,53.924 r90 top
C27 "100n" R1005_0402i_L 28.563,53.924 r90 top
C28 "100n" R1005_0402i_L 99.536,102.785 r90 top
C29 "100n" R1005_0402i_L 100.807,102.785 r90 top
C30 "1u" C1608_0603I_L 34.525,102.525 r90 top
C31 "100n" R1005_0402i_L 103.349,102.785 r90 top
C32 "100n" R1005_0402i_L 98.264,102.785 r90 top
C33 "100n" R1005_0402i_L 102.078,102.785 r90 top
C34 "100n" R1005_0402i_L 96.993,102.785 r90 top
FB2 "FERITTE BEAD" R1608_0603I_L 36.111,102.535 r90 top
J2_U_rel_ladder1 "JMP_mini" solderJumper 57,29.3 r180 top (schematic designator J2)
J2_U_rel_ladder2 "JMP_mini" solderJumper 57,42 r180 top (schematic designator J2)
J2_U_rel_ladder3 "JMP_mini" solderJumper 57,54.7 r180 top (schematic designator J2)
J2_U_rel_ladder4 "JMP_mini" solderJumper 57,67.4 r180 top (schematic designator J2)
J2_U_rel_ladder5 "JMP_mini" solderJumper 57,80.1 r180 top (schematic designator J2)
J2_U_rel_ladder6 "JMP_mini" solderJumper 57.006,90.466 r180 bottom (schematic designator J2)
J2_U_rel_ladder7 "JMP_mini" solderJumper 57.002,77.734 r180 bottom (schematic designator J2)
J2_U_rel_ladder8 "JMP_mini" solderJumper 57.002,65.034 r180 bottom (schematic designator J2)
J2_U_rel_ladder9 "JMP_mini" solderJumper 56.988,52.334 r180 bottom (schematic designator J2)
J2_U_rel_ladder10 "JMP_mini" solderJumper 57.002,39.634 r180 bottom (schematic designator J2)
J4 "Terminator" solderJumper 57.206,98.768 r0 top
J5 "JMP_mini" solderJumper 30.692,38.6 r0 top
K1_U_rel_ladder1 "DPDT" "AXICOM IM-G Relay" 57.596,34.468 r0 top (schematic designator K1)
K1_U_rel_ladder2 "DPDT" "AXICOM IM-G Relay" 57.596,47.168 r0 top (schematic designator K1)
K1_U_rel_ladder3 "DPDT" "AXICOM IM-G Relay" 57.596,59.868 r0 top (schematic designator K1)
K1_U_rel_ladder4 "DPDT" "AXICOM IM-G Relay" 57.596,72.568 r0 top (schematic designator K1)
K1_U_rel_ladder5 "DPDT" "AXICOM IM-G Relay" 57.596,85.268 r0 top (schematic designator K1)
K1_U_rel_ladder6 "DPDT" "AXICOM IM-G Relay" 57.6,85.3 r0 bottom (schematic designator K1)
K1_U_rel_ladder7 "DPDT" "AXICOM IM-G Relay" 57.596,72.568 r0 bottom (schematic designator K1)
K1_U_rel_ladder8 "DPDT" "AXICOM IM-G Relay" 57.596,59.868 r0 bottom (schematic designator K1)
K1_U_rel_ladder9 "DPDT" "AXICOM IM-G Relay" 57.582,47.168 r0 bottom (schematic designator K1)
K1_U_rel_ladder10 "DPDT" "AXICOM IM-G Relay" 57.596,34.468 r0 bottom (schematic designator K1)
K2_U_rel_ladder1 "DPDT" "AXICOM IM-G Relay" 67.829,34.468 r0 top (schematic designator K2)
K2_U_rel_ladder2 "DPDT" "AXICOM IM-G Relay" 67.829,47.168 r0 top (schematic designator K2)
K2_U_rel_ladder3 "DPDT" "AXICOM IM-G Relay" 67.829,59.868 r0 top (schematic designator K2)
K2_U_rel_ladder4 "DPDT" "AXICOM IM-G Relay" 67.829,72.568 r0 top (schematic designator K2)
K2_U_rel_ladder5 "DPDT" "AXICOM IM-G Relay" 67.829,85.268 r0 top (schematic designator K2)
K2_U_rel_ladder6 "DPDT" "AXICOM IM-G Relay" 67.833,85.3 r0 bottom (schematic designator K2)
K2_U_rel_ladder7 "DPDT" "AXICOM IM-G Relay" 67.829,72.568 r0 bottom (schematic designator K2)
K2_U_rel_ladder8 "DPDT" "AXICOM IM-G Relay" 67.829,59.868 r0 bottom (schematic designator K2)
K2_U_rel_ladder9 "DPDT" "AXICOM IM-G Relay" 67.814,47.168 r0 bottom (schematic designator K2)
K2_U_rel_ladder10 "DPDT" "AXICOM IM-G Relay" 67.829,34.468 r0 bottom (schematic designator K2)
K3_U_rel_ladder1 "DPDT" "AXICOM IM-G Relay" 78.061,34.468 r0 top (schematic designator K3)
K3_U_rel_ladder2 "DPDT" "AXICOM IM-G Relay" 78.061,47.168 r0 top (schematic designator K3)
K3_U_rel_ladder3 "DPDT" "AXICOM IM-G Relay" 78.061,59.868 r0 top (schematic designator K3)
K3_U_rel_ladder4 "DPDT" "AXICOM IM-G Relay" 78.061,72.568 r0 top (schematic designator K3)
K3_U_rel_ladder5 "DPDT" "AXICOM IM-G Relay" 78.061,85.268 r0 top (schematic designator K3)
K3_U_rel_ladder6 "DPDT" "AXICOM IM-G Relay" 78.052,85.3 r0 bottom (schematic designator K3)
K3_U_rel_ladder7 "DPDT" "AXICOM IM-G Relay" 78.048,72.568 r0 bottom (schematic designator K3)
K3_U_rel_ladder8 "DPDT" "AXICOM IM-G Relay" 78.048,59.868 r0 bottom (schematic designator K3)
K3_U_rel_ladder9 "DPDT" "AXICOM IM-G Relay" 78.034,47.168 r0 bottom (schematic designator K3)
K3_U_rel_ladder10 "DPDT" "AXICOM IM-G Relay" 78.048,34.468 r0 bottom (schematic designator K3)
K4_U_rel_ladder1 "DPDT" "AXICOM IM-G Relay" 88.294,34.468 r0 top (schematic designator K4)
K4_U_rel_ladder2 "DPDT" "AXICOM IM-G Relay" 88.294,47.168 r0 top (schematic designator K4)
K4_U_rel_ladder3 "DPDT" "AXICOM IM-G Relay" 88.294,59.868 r0 top (schematic designator K4)
K4_U_rel_ladder4 "DPDT" "AXICOM IM-G Relay" 88.294,72.568 r0 top (schematic designator K4)
K4_U_rel_ladder5 "DPDT" "AXICOM IM-G Relay" 88.294,85.268 r0 top (schematic designator K4)
K4_U_rel_ladder6 "DPDT" "AXICOM IM-G Relay" 88.268,85.3 r0 bottom (schematic designator K4)
K4_U_rel_ladder7 "DPDT" "AXICOM IM-G Relay" 88.264,72.568 r0 bottom (schematic designator K4)
K4_U_rel_ladder8 "DPDT" "AXICOM IM-G Relay" 88.264,59.868 r0 bottom (schematic designator K4)
K4_U_rel_ladder9 "DPDT" "AXICOM IM-G Relay" 88.25,47.168 r0 bottom (schematic designator K4)
K4_U_rel_ladder10 "DPDT" "AXICOM IM-G Relay" 88.264,34.468 r0 bottom (schematic designator K4)
K5_U_rel_ladder1 "DPDT" "AXICOM IM-G Relay" 98.526,34.468 r0 top (schematic designator K5)
K5_U_rel_ladder2 "DPDT" "AXICOM IM-G Relay" 98.526,47.168 r0 top (schematic designator K5)
K5_U_rel_ladder3 "DPDT" "AXICOM IM-G Relay" 98.526,59.868 r0 top (schematic designator K5)
K5_U_rel_ladder4 "DPDT" "AXICOM IM-G Relay" 98.526,72.568 r0 top (schematic designator K5)
K5_U_rel_ladder5 "DPDT" "AXICOM IM-G Relay" 98.526,85.268 r0 top (schematic designator K5)
K5_U_rel_ladder6 "DPDT" "AXICOM IM-G Relay" 98.539,85.3 r0 bottom (schematic designator K5)
K5_U_rel_ladder7 "DPDT" "AXICOM IM-G Relay" 98.535,72.568 r0 bottom (schematic designator K5)
K5_U_rel_ladder8 "DPDT" "AXICOM IM-G Relay" 98.535,59.868 r0 bottom (schematic designator K5)
K5_U_rel_ladder9 "DPDT" "AXICOM IM-G Relay" 98.521,47.168 r0 bottom (schematic designator K5)
K5_U_rel_ladder10 "DPDT" "AXICOM IM-G Relay" 98.535,34.468 r0 bottom (schematic designator K5)
K6_U_rel_ladder1 "DPDT" "AXICOM IM-G Relay" 108.759,34.468 r0 top (schematic designator K6)
K6_U_rel_ladder2 "DPDT" "AXICOM IM-G Relay" 108.759,47.168 r0 top (schematic designator K6)
K6_U_rel_ladder3 "DPDT" "AXICOM IM-G Relay" 108.759,59.868 r0 top (schematic designator K6)
K6_U_rel_ladder4 "DPDT" "AXICOM IM-G Relay" 108.759,72.568 r0 top (schematic designator K6)
K6_U_rel_ladder5 "DPDT" "AXICOM IM-G Relay" 108.759,85.268 r0 top (schematic designator K6)
K6_U_rel_ladder6 "DPDT" "AXICOM IM-G Relay" 108.784,85.3 r0 bottom (schematic designator K6)
K6_U_rel_ladder7 "DPDT" "AXICOM IM-G Relay" 108.78,72.568 r0 bottom (schematic designator K6)
K6_U_rel_ladder8 "DPDT" "AXICOM IM-G Relay" 108.78,59.868 r0 bottom (schematic designator K6)
K6_U_rel_ladder9 "DPDT" "AXICOM IM-G Relay" 108.766,47.168 r0 bottom (schematic designator K6)
K6_U_rel_ladder10 "DPDT" "AXICOM IM-G Relay" 108.78,34.468 r0 bottom (schematic designator K6)
K7_U_rel_ladder1 "DPDT" "AXICOM IM-G Relay" 118.991,34.468 r0 top (schematic designator K7)
K7_U_rel_ladder2 "DPDT" "AXICOM IM-G Relay" 118.991,47.168 r0 top (schematic designator K7)
K7_U_rel_ladder3 "DPDT" "AXICOM IM-G Relay" 118.991,59.868 r0 top (schematic designator K7)
K7_U_rel_ladder4 "DPDT" "AXICOM IM-G Relay" 118.991,72.568 r0 top (schematic designator K7)
K7_U_rel_ladder5 "DPDT" "AXICOM IM-G Relay" 118.991,85.268 r0 top (schematic designator K7)
K7_U_rel_ladder6 "DPDT" "AXICOM IM-G Relay" 119.014,85.3 r0 bottom (schematic designator K7)
K7_U_rel_ladder7 "DPDT" "AXICOM IM-G Relay" 119.01,72.568 r0 bottom (schematic designator K7)
K7_U_rel_ladder8 "DPDT" "AXICOM IM-G Relay" 119.01,59.868 r0 bottom (schematic designator K7)
K7_U_rel_ladder9 "DPDT" "AXICOM IM-G Relay" 118.996,47.168 r0 bottom (schematic designator K7)
K7_U_rel_ladder10 "DPDT" "AXICOM IM-G Relay" 119.01,34.468 r0 bottom (schematic designator K7)
K8_U_rel_ladder1 "DPDT" "AXICOM IM-G Relay" 129.224,34.468 r0 top (schematic designator K8)
K8_U_rel_ladder2 "DPDT" "AXICOM IM-G Relay" 129.224,47.168 r0 top (schematic designator K8)
K8_U_rel_ladder3 "DPDT" "AXICOM IM-G Relay" 129.224,59.868 r0 top (schematic designator K8)
K8_U_rel_ladder4 "DPDT" "AXICOM IM-G Relay" 129.224,72.568 r0 top (schematic designator K8)
K8_U_rel_ladder5 "DPDT" "AXICOM IM-G Relay" 129.224,85.268 r0 top (schematic designator K8)
K8_U_rel_ladder6 "DPDT" "AXICOM IM-G Relay" 129.228,85.3 r0 bottom (schematic designator K8)
K8_U_rel_ladder7 "DPDT" "AXICOM IM-G Relay" 129.224,72.568 r0 bottom (schematic designator K8)
K8_U_rel_ladder8 "DPDT" "AXICOM IM-G Relay" 129.224,59.868 r0 bottom (schematic designator K8)
K8_U_rel_ladder9 "DPDT" "AXICOM IM-G Relay" 129.21,47.168 r0 bottom (schematic designator K8)
K8_U_rel_ladder10 "DPDT" "AXICOM IM-G Relay" 129.224,34.468 r0 bottom (schematic designator K8)
LD2 "NCP115 3.3V" TSOP95P280X110-6L 127.334,108.661 r0 top
MCP2 "MCP32017" "MCP23017 QFN" 39.5,46.493 r270 top
MCP3 "MCP32017" "MCP23017 QFN" 39.5,71.893 r270 top
MCP4 "MCP32017" "MCP23017 QFN" 39.5,84.593 r0 top
MCP5 "MCP32017" "MCP23017 QFN" 39.5,59.893 r90 bottom
MCP6 "MCP32017" "MCP23017 QFN" 39.5,34.493 r90 bottom
P5 "Header 10X2" HDR2X10 145.64,64 r90 top
P6 "Header 10X2" HDR2X10 145.64,31.54 r90 top
P7 "PWR" HDR1X4 34.112,106.038 r90 top
P8 "PWR" HDR1X4 30.864,106.038 r90 top
P9 "Input" "1.27mm SMD conn" 49.913,107.48 r0 top
P10 "Output" "1.27mm SMD conn" 57.734,107.48 r0 top
R1_U_rel_ladder1 "R/2" R2012_0805I_L 129.478,39.675 r180 top (schematic designator R1)
R1_U_rel_ladder2 "R/2" R2012_0805I_L 129.478,52.375 r180 top (schematic designator R1)
R1_U_rel_ladder3 "R/2" R2012_0805I_L 129.478,65.075 r180 top (schematic designator R1)
R1_U_rel_ladder4 "R/2" R2012_0805I_L 129.478,77.775 r180 top (schematic designator R1)
R1_U_rel_ladder5 "R/2" R2012_0805I_L 129.478,90.475 r180 top (schematic designator R1)
R1_U_rel_ladder6 "R/2" R2012_0805I_L 129.506,80.166 r180 bottom (schematic designator R1)
R1_U_rel_ladder7 "R/2" R2012_0805I_L 129.502,67.434 r180 bottom (schematic designator R1)
R1_U_rel_ladder8 "R/2" R2012_0805I_L 129.502,54.734 r180 bottom (schematic designator R1)
R1_U_rel_ladder9 "R/2" R2012_0805I_L 129.488,42.034 r180 bottom (schematic designator R1)
R1_U_rel_ladder10 "R/2" R2012_0805I_L 129.502,29.334 r180 bottom (schematic designator R1)
R2_U_rel_ladder1 "R/2" R2012_0805I_L 132.184,29.288 r180 top (schematic designator R2)
R2_U_rel_ladder2 "R/2" R2012_0805I_L 132.184,41.988 r180 top (schematic designator R2)
R2_U_rel_ladder3 "R/2" R2012_0805I_L 132.184,54.688 r180 top (schematic designator R2)
R2_U_rel_ladder4 "R/2" R2012_0805I_L 132.184,67.388 r180 top (schematic designator R2)
R2_U_rel_ladder5 "R/2" R2012_0805I_L 132.184,80.088 r180 top (schematic designator R2)
R2_U_rel_ladder6 "R/2" R2012_0805I_L 132.156,90.507 r180 bottom (schematic designator R2)
R2_U_rel_ladder7 "R/2" R2012_0805I_L 132.152,77.775 r180 bottom (schematic designator R2)
R2_U_rel_ladder8 "R/2" R2012_0805I_L 132.152,65.075 r180 bottom (schematic designator R2)
R2_U_rel_ladder9 "R/2" R2012_0805I_L 132.138,52.375 r180 bottom (schematic designator R2)
R2_U_rel_ladder10 "R/2" R2012_0805I_L 132.152,39.675 r180 bottom (schematic designator R2)
R3_U_rel_ladder1 "R/4" R2012_0805I_L 119.279,39.675 r180 top (schematic designator R3)
R3_U_rel_ladder2 "R/4" R2012_0805I_L 119.279,52.375 r180 top (schematic designator R3)
R3_U_rel_ladder3 "R/4" R2012_0805I_L 119.279,65.075 r180 top (schematic designator R3)
R3_U_rel_ladder4 "R/4" R2012_0805I_L 119.279,77.775 r180 top (schematic designator R3)
R3_U_rel_ladder5 "R/4" R2012_0805I_L 119.279,90.475 r180 top (schematic designator R3)
R3_U_rel_ladder6 "R/4" R2012_0805I_L 119.256,80.166 r180 bottom (schematic designator R3)
R3_U_rel_ladder7 "R/4" R2012_0805I_L 119.252,67.434 r180 bottom (schematic designator R3)
R3_U_rel_ladder8 "R/4" R2012_0805I_L 119.252,54.734 r180 bottom (schematic designator R3)
R3_U_rel_ladder9 "R/4" R2012_0805I_L 119.238,42.034 r180 bottom (schematic designator R3)
R3_U_rel_ladder10 "R/4" R2012_0805I_L 119.252,29.334 r180 bottom (schematic designator R3)
R4_U_rel_ladder1 "R/4" R2012_0805I_L 121.897,29.288 r180 top (schematic designator R4)
R4_U_rel_ladder2 "R/4" R2012_0805I_L 121.897,41.988 r180 top (schematic designator R4)
R4_U_rel_ladder3 "R/4" R2012_0805I_L 121.897,54.688 r180 top (schematic designator R4)
R4_U_rel_ladder4 "R/4" R2012_0805I_L 121.897,67.388 r180 top (schematic designator R4)
R4_U_rel_ladder5 "R/4" R2012_0805I_L 121.897,80.088 r180 top (schematic designator R4)
R4_U_rel_ladder6 "R/4" R2012_0805I_L 121.956,90.507 r180 bottom (schematic designator R4)
R4_U_rel_ladder7 "R/4" R2012_0805I_L 121.952,77.775 r180 bottom (schematic designator R4)
R4_U_rel_ladder8 "R/4" R2012_0805I_L 121.952,65.075 r180 bottom (schematic designator R4)
R4_U_rel_ladder9 "R/4" R2012_0805I_L 121.938,52.375 r180 bottom (schematic designator R4)
R4_U_rel_ladder10 "R/4" R2012_0805I_L 121.952,39.675 r180 bottom (schematic designator R4)
R5_U_rel_ladder1 "R/8" R2012_0805I_L 109.031,39.675 r180 top (schematic designator R5)
R5_U_rel_ladder2 "R/8" R2012_0805I_L 109.031,52.375 r180 top (schematic designator R5)
R5_U_rel_ladder3 "R/8" R2012_0805I_L 109.031,65.075 r180 top (schematic designator R5)
R5_U_rel_ladder4 "R/8" R2012_0805I_L 109.031,77.775 r180 top (schematic designator R5)
R5_U_rel_ladder5 "R/8" R2012_0805I_L 109.031,90.475 r180 top (schematic designator R5)
R5_U_rel_ladder6 "R/8" R2012_0805I_L 109.006,80.166 r180 bottom (schematic designator R5)
R5_U_rel_ladder7 "R/8" R2012_0805I_L 109.002,67.434 r180 bottom (schematic designator R5)
R5_U_rel_ladder8 "R/8" R2012_0805I_L 109.002,54.734 r180 bottom (schematic designator R5)
R5_U_rel_ladder9 "R/8" R2012_0805I_L 108.988,42.034 r180 bottom (schematic designator R5)
R5_U_rel_ladder10 "R/8" R2012_0805I_L 109.002,29.334 r180 bottom (schematic designator R5)
R6_U_rel_ladder1 "R/8" R2012_0805I_L 111.698,29.288 r180 top (schematic designator R6)
R6_U_rel_ladder2 "R/8" R2012_0805I_L 111.698,41.988 r180 top (schematic designator R6)
R6_U_rel_ladder3 "R/8" R2012_0805I_L 111.698,54.688 r180 top (schematic designator R6)
R6_U_rel_ladder4 "R/8" R2012_0805I_L 111.698,67.388 r180 top (schematic designator R6)
R6_U_rel_ladder5 "R/8" R2012_0805I_L 111.698,80.088 r180 top (schematic designator R6)
R6_U_rel_ladder6 "R/8" R2012_0805I_L 111.706,90.507 r180 bottom (schematic designator R6)
R6_U_rel_ladder7 "R/8" R2012_0805I_L 111.702,77.775 r180 bottom (schematic designator R6)
R6_U_rel_ladder8 "R/8" R2012_0805I_L 111.702,65.075 r180 bottom (schematic designator R6)
R6_U_rel_ladder9 "R/8" R2012_0805I_L 111.688,52.375 r180 bottom (schematic designator R6)
R6_U_rel_ladder10 "R/8" R2012_0805I_L 111.702,39.675 r180 bottom (schematic designator R6)
R7_U_rel_ladder1 "R/16" R2012_0805I_L 98.744,39.675 r180 top (schematic designator R7)
R7_U_rel_ladder2 "R/16" R2012_0805I_L 98.744,52.375 r180 top (schematic designator R7)
R7_U_rel_ladder3 "R/16" R2012_0805I_L 98.744,65.075 r180 top (schematic designator R7)
R7_U_rel_ladder4 "R/16" R2012_0805I_L 98.744,77.775 r180 top (schematic designator R7)
R7_U_rel_ladder5 "R/16" R2012_0805I_L 98.744,90.475 r180 top (schematic designator R7)
R7_U_rel_ladder6 "R/16" R2012_0805I_L 98.806,80.166 r180 bottom (schematic designator R7)
R7_U_rel_ladder7 "R/16" R2012_0805I_L 98.802,67.434 r180 bottom (schematic designator R7)
R7_U_rel_ladder8 "R/16" R2012_0805I_L 98.802,54.734 r180 bottom (schematic designator R7)
R7_U_rel_ladder9 "R/16" R2012_0805I_L 98.788,42.034 r180 bottom (schematic designator R7)
R7_U_rel_ladder10 "R/16" R2012_0805I_L 98.802,29.334 r180 bottom (schematic designator R7)
R8_U_rel_ladder1 "R/16" R2012_0805I_L 101.45,29.288 r180 top (schematic designator R8)
R8_U_rel_ladder2 "R/16" R2012_0805I_L 101.45,41.988 r180 top (schematic designator R8)
R8_U_rel_ladder3 "R/16" R2012_0805I_L 101.45,54.688 r180 top (schematic designator R8)
R8_U_rel_ladder4 "R/16" R2012_0805I_L 101.45,67.388 r180 top (schematic designator R8)
R8_U_rel_ladder5 "R/16" R2012_0805I_L 101.45,80.088 r180 top (schematic designator R8)
R8_U_rel_ladder6 "R/16" R2012_0805I_L 101.506,90.507 r180 bottom (schematic designator R8)
R8_U_rel_ladder7 "R/16" R2012_0805I_L 101.502,77.775 r180 bottom (schematic designator R8)
R8_U_rel_ladder8 "R/16" R2012_0805I_L 101.502,65.075 r180 bottom (schematic designator R8)
R8_U_rel_ladder9 "R/16" R2012_0805I_L 101.488,52.375 r180 bottom (schematic designator R8)
R8_U_rel_ladder10 "R/16" R2012_0805I_L 101.502,39.675 r180 bottom (schematic designator R8)
R9_U_rel_ladder1 "R/32" R2012_0805I_L 88.584,39.675 r180 top (schematic designator R9)
R9_U_rel_ladder2 "R/32" R2012_0805I_L 88.584,52.375 r180 top (schematic designator R9)
R9_U_rel_ladder3 "R/32" R2012_0805I_L 88.584,65.075 r180 top (schematic designator R9)
R9_U_rel_ladder4 "R/32" R2012_0805I_L 88.584,77.775 r180 top (schematic designator R9)
R9_U_rel_ladder5 "R/32" R2012_0805I_L 88.584,90.475 r180 top (schematic designator R9)
R9_U_rel_ladder6 "R/32" R2012_0805I_L 88.506,80.166 r180 bottom (schematic designator R9)
R9_U_rel_ladder7 "R/32" R2012_0805I_L 88.502,67.434 r180 bottom (schematic designator R9)
R9_U_rel_ladder8 "R/32" R2012_0805I_L 88.502,54.734 r180 bottom (schematic designator R9)
R9_U_rel_ladder9 "R/32" R2012_0805I_L 88.488,42.034 r180 bottom (schematic designator R9)
R9_U_rel_ladder10 "R/32" R2012_0805I_L 88.502,29.334 r180 bottom (schematic designator R9)
R10_U_rel_ladder1 "R/32" R2012_0805I_L 91.251,29.288 r180 top (schematic designator R10)
R10_U_rel_ladder2 "R/32" R2012_0805I_L 91.251,41.988 r180 top (schematic designator R10)
R10_U_rel_ladder3 "R/32" R2012_0805I_L 91.251,54.688 r180 top (schematic designator R10)
R10_U_rel_ladder4 "R/32" R2012_0805I_L 91.251,67.388 r180 top (schematic designator R10)
R10_U_rel_ladder5 "R/32" R2012_0805I_L 91.251,80.088 r180 top (schematic designator R10)
R10_U_rel_ladder6 "R/32" R2012_0805I_L 91.206,90.507 r180 bottom (schematic designator R10)
R10_U_rel_ladder7 "R/32" R2012_0805I_L 91.202,77.775 r180 bottom (schematic designator R10)
R10_U_rel_ladder8 "R/32" R2012_0805I_L 91.202,65.075 r180 bottom (schematic designator R10)
R10_U_rel_ladder9 "R/32" R2012_0805I_L 91.188,52.375 r180 bottom (schematic designator R10)
R10_U_rel_ladder10 "R/32" R2012_0805I_L 91.202,39.675 r180 bottom (schematic designator R10)
R11_U_rel_ladder1 "R/64" R2012_0805I_L 78.297,39.675 r180 top (schematic designator R11)
R11_U_rel_ladder2 "R/64" R2012_0805I_L 78.297,52.375 r180 top (schematic designator R11)
R11_U_rel_ladder3 "R/64" R2012_0805I_L 78.297,65.075 r180 top (schematic designator R11)
R11_U_rel_ladder4 "R/64" R2012_0805I_L 78.297,77.775 r180 top (schematic designator R11)
R11_U_rel_ladder5 "R/64" R2012_0805I_L 78.297,90.475 r180 top (schematic designator R11)
R11_U_rel_ladder6 "R/64" R2012_0805I_L 78.306,80.166 r180 bottom (schematic designator R11)
R11_U_rel_ladder7 "R/64" R2012_0805I_L 78.302,67.434 r180 bottom (schematic designator R11)
R11_U_rel_ladder8 "R/64" R2012_0805I_L 78.302,54.734 r180 bottom (schematic designator R11)
R11_U_rel_ladder9 "R/64" R2012_0805I_L 78.288,42.034 r180 bottom (schematic designator R11)
R11_U_rel_ladder10 "R/64" R2012_0805I_L 78.302,29.334 r180 bottom (schematic designator R11)
R12_U_rel_ladder1 "R/64" R2012_0805I_L 81.003,29.288 r180 top (schematic designator R12)
R12_U_rel_ladder2 "R/64" R2012_0805I_L 81.003,41.988 r180 top (schematic designator R12)
R12_U_rel_ladder3 "R/64" R2012_0805I_L 81.003,54.688 r180 top (schematic designator R12)
R12_U_rel_ladder4 "R/64" R2012_0805I_L 81.003,67.388 r180 top (schematic designator R12)
R12_U_rel_ladder5 "R/64" R2012_0805I_L 81.003,80.088 r180 top (schematic designator R12)
R12_U_rel_ladder6 "R/64" R2012_0805I_L 81.006,90.507 r180 bottom (schematic designator R12)
R12_U_rel_ladder7 "R/64" R2012_0805I_L 81.002,77.775 r180 bottom (schematic designator R12)
R12_U_rel_ladder8 "R/64" R2012_0805I_L 81.002,65.075 r180 bottom (schematic designator R12)
R12_U_rel_ladder9 "R/64" R2012_0805I_L 80.988,52.375 r180 bottom (schematic designator R12)
R12_U_rel_ladder10 "R/64" R2012_0805I_L 81.002,39.675 r180 bottom (schematic designator R12)
R13_U_rel_ladder1 "R/128" R2012_0805I_L 68.098,39.675 r180 top (schematic designator R13)
R13_U_rel_ladder2 "R/128" R2012_0805I_L 68.098,52.375 r180 top (schematic designator R13)
R13_U_rel_ladder3 "R/128" R2012_0805I_L 68.098,65.075 r180 top (schematic designator R13)
R13_U_rel_ladder4 "R/128" R2012_0805I_L 68.098,77.775 r180 top (schematic designator R13)
R13_U_rel_ladder5 "R/128" R2012_0805I_L 68.098,90.475 r180 top (schematic designator R13)
R13_U_rel_ladder6 "R/128" R2012_0805I_L 68.106,80.166 r180 bottom (schematic designator R13)
R13_U_rel_ladder7 "R/128" R2012_0805I_L 68.102,67.434 r180 bottom (schematic designator R13)
R13_U_rel_ladder8 "R/128" R2012_0805I_L 68.102,54.734 r180 bottom (schematic designator R13)
R13_U_rel_ladder9 "R/128" R2012_0805I_L 68.088,42.034 r180 bottom (schematic designator R13)
R13_U_rel_ladder10 "R/128" R2012_0805I_L 68.102,29.334 r180 bottom (schematic designator R13)
R14_U_rel_ladder1 "R/128" R2012_0805I_L 70.804,29.288 r180 top (schematic designator R14)
R14_U_rel_ladder2 "R/128" R2012_0805I_L 70.804,41.988 r180 top (schematic designator R14)
R14_U_rel_ladder3 "R/128" R2012_0805I_L 70.804,54.688 r180 top (schematic designator R14)
R14_U_rel_ladder4 "R/128" R2012_0805I_L 70.804,67.388 r180 top (schematic designator R14)
R14_U_rel_ladder5 "R/128" R2012_0805I_L 70.804,80.088 r180 top (schematic designator R14)
R14_U_rel_ladder6 "R/128" R2012_0805I_L 70.756,90.507 r180 bottom (schematic designator R14)
R14_U_rel_ladder7 "R/128" R2012_0805I_L 70.752,77.775 r180 bottom (schematic designator R14)
R14_U_rel_ladder8 "R/128" R2012_0805I_L 70.752,65.075 r180 bottom (schematic designator R14)
R14_U_rel_ladder9 "R/128" R2012_0805I_L 70.738,52.375 r180 bottom (schematic designator R14)
R14_U_rel_ladder10 "R/128" R2012_0805I_L 70.752,39.675 r180 bottom (schematic designator R14)
R15_U_rel_ladder1 "R/256" R2012_0805I_L 57.85,39.675 r180 top (schematic designator R15)
R15_U_rel_ladder2 "R/256" R2012_0805I_L 57.85,52.375 r180 top (schematic designator R15)
R15_U_rel_ladder3 "R/256" R2012_0805I_L 57.85,65.075 r180 top (schematic designator R15)
R15_U_rel_ladder4 "R/256" R2012_0805I_L 57.85,77.775 r180 top (schematic designator R15)
R15_U_rel_ladder5 "R/256" R2012_0805I_L 57.85,90.475 r180 top (schematic designator R15)
R15_U_rel_ladder6 "R/256" R2012_0805I_L 57.849,80.166 r180 bottom (schematic designator R15)
R15_U_rel_ladder7 "R/256" R2012_0805I_L 57.845,67.434 r180 bottom (schematic designator R15)
R15_U_rel_ladder8 "R/256" R2012_0805I_L 57.845,54.734 r180 bottom (schematic designator R15)
R15_U_rel_ladder9 "R/256" R2012_0805I_L 57.831,42.034 r180 bottom (schematic designator R15)
R15_U_rel_ladder10 "R/256" R2012_0805I_L 57.845,29.334 r180 bottom (schematic designator R15)
R16_U_rel_ladder1 "R/256" R2012_0805I_L 60.556,29.288 r180 top (schematic designator R16)
R16_U_rel_ladder2 "R/256" R2012_0805I_L 60.556,41.988 r180 top (schematic designator R16)
R16_U_rel_ladder3 "R/256" R2012_0805I_L 60.556,54.688 r180 top (schematic designator R16)
R16_U_rel_ladder4 "R/256" R2012_0805I_L 60.556,67.388 r180 top (schematic designator R16)
R16_U_rel_ladder5 "R/256" R2012_0805I_L 60.556,80.088 r180 top (schematic designator R16)
R16_U_rel_ladder6 "R/256" R2012_0805I_L 60.544,90.507 r180 bottom (schematic designator R16)
R16_U_rel_ladder7 "R/256" R2012_0805I_L 60.54,77.775 r180 bottom (schematic designator R16)
R16_U_rel_ladder8 "R/256" R2012_0805I_L 60.54,65.075 r180 bottom (schematic designator R16)
R16_U_rel_ladder9 "R/256" R2012_0805I_L 60.525,52.375 r180 bottom (schematic designator R16)
R16_U_rel_ladder10 "R/256" R2012_0805I_L 60.54,39.675 r180 bottom (schematic designator R16)
R26 "100k" R1005_0402i_L 69.027,102.785 r90 top
R27 "100k" R1005_0402i_L 70.298,102.785 r90 top
R28 "100k" R1005_0402i_L 71.569,102.785 r90 top
R29 "100k" R1005_0402i_L 65.213,102.785 r90 top
R30 "500" R1005_0402i_L 66.484,102.785 r90 top
R31 "500" R1005_0402i_L 67.756,102.785 r90 top
R32 "500" R1005_0402i_L 72.84,102.785 r90 top
R33 "500" R1005_0402i_L 77.925,102.785 r90 top
R34 "100k" R1005_0402i_L 79.196,102.785 r90 top
R35 "100k" R1005_0402i_L 80.468,102.785 r90 top
R36 "100k" R1005_0402i_L 74.112,102.785 r90 top
R37 "10k" R1005_0402i_L 75.383,102.785 r90 top
R38 "10k" R1005_0402i_L 76.654,102.785 r90 top
TP3 "PAD" PAD_CIRC_HOLE 135.5,32.7 r90 top
TP4 "PAD" PAD_CIRC_HOLE 135.5,45.4 r90 top
TP5 "PAD" PAD_CIRC_HOLE 135.5,58.1 r90 top
TP6 "PAD" PAD_CIRC_HOLE 135.5,70.8 r90 top
TP7 "PAD" PAD_CIRC_HOLE 135.5,83.5 r90 top
TP8 "PAD" PAD_CIRC_HOLE 135.5,87.1 r90 top
TP9 "PAD" PAD_CIRC_HOLE 135.5,74.4 r90 top
TP10 "PAD" PAD_CIRC_HOLE 135.5,61.7 r90 top
TP11 "PAD" PAD_CIRC_HOLE 135.5,48.9 r90 top
TP12 "PAD" PAD_CIRC_HOLE 135.5,36.3 r90 top
U2 "ATtiny88-MMU" 28M1_N 20.5,88.2 r0 top
ULN3 "ULN2803" QFN127P600-8N 47.8,38.1 r0 top
ULN4 "ULN2803" QFN127P600-8N 47.848,50.784 r0 top
ULN5 "ULN2803" QFN127P600-8N 47.825,63.509 r0 top
ULN6 "ULN2803" QFN127P600-8N 47.825,76.209 r0 top
ULN7 "ULN2803" QFN127P600-8N 47.825,88.909 r0 top
ULN8 "ULN2803" QFN127P600-8N 47.825,81.638 r0 bottom
ULN9 "ULN2803" QFN127P600-8N 47.825,68.9 r0 bottom
ULN10 "ULN2803" QFN127P600-8N 47.8,56.198 r0 bottom
ULN11 "ULN2803" QFN127P600-8N 47.8,43.506 r0 bottom
ULN12 "ULN2803" QFN127P600-8N 47.775,30.8 r0 bottom

## Footprints (in the part's own frame and the unit in brackets; to place one, negate y for a bottom-side part, rotate by r counter-clockwise, add the part's x,y. Pads: shape width x height; smd on the part's side, far side on the other; paste and mask are expansions set on the pad)
"1.27mm SMD conn" [mm]
  rect 0.76x2.4 smd: 1(3.175,1.905) 2(3.175,-1.905) 3(1.905,1.905) 4(1.905,-1.905) 5(0.635,1.905) 6(0.635,-1.905) 7(-0.635,1.905) 8(-0.635,-1.905) 9(-1.905,1.905) 10(-1.905,-1.905) 11(-3.175,1.905) 12(-3.175,-1.905)
28M1_N [mm]
  oval 0.75x0.2 smd: 1(-2.025,1.35) 2(-2.025,0.9) 3(-2.025,0.45) 4(-2.025,0) 5(-2.025,-0.45) 6(-2.025,-0.9) 7(-2.025,-1.35) 15(2.025,-1.35) 16(2.025,-0.9) 17(2.025,-0.45) 18(2.025,0) 19(2.025,0.45) 20(2.025,0.9) 21(2.025,1.35)
  oval 0.2x0.75 smd: 8(-1.35,-2.025) 9(-0.9,-2.025) 10(-0.45,-2.025) 11(0,-2.025) 12(0.45,-2.025) 13(0.9,-2.025) 14(1.35,-2.025) 22(1.35,2.025) 23(0.9,2.025) 24(0.45,2.025) 25(0,2.025) 26(-0.45,2.025) 27(-0.9,2.025) 28(-1.35,2.025)
  rect 2.5x2.5 smd: 29(0,0)
  silkscreen extent -2.45,1.88 -2.2,2.12, body extent -2.02,-2.02 2.02,2.02, height 1
"AXICOM IM-G Relay" [mm] "TE CONNECTIVITY AXICOM IM-G (Gull wings) Relay SMD"
  rect 0.7x1.7 smd: 1(-3.8,-3.1) 2(-0.6,-3.1) 3(1.6,-3.1) 4(3.8,-3.1) 5(3.8,3.1) 6(1.6,3.1) 7(-0.6,3.1) 8(-3.8,3.1)
  silkscreen extent -5,-3 5,3
C1608_0603I_L [mm] "Chip Capacitor, 2-Leads, Body 1.57x0.85mm, IPC High Density"
  rect 0.72x0.9 smd: 1(-0.6,0) 2(0.6,0)
  body extent -0.82,-0.48 0.82,0.48, height 0.95
HDR1X4 [mm] "Connector; Header; 4 Position"
  rect 1.5x1.5 hole 0.9: 1(0,0)
  round 1.5 hole 0.9: 2(2.54,0) 3(5.08,0) 4(7.62,0)
  silkscreen extent -1.27,-1.27 8.89,1.27
HDR2X10 [mm] "Connector; Header; 10x2 Position"
  rect 1.5x1.5 hole 0.9: 1(0,0)
  round 1.5 hole 0.9: 2(0,2.54) 3(2.54,0) 4(2.54,2.54) 5(5.08,0) 6(5.08,2.54) 7(7.62,0) 8(7.62,2.54) 9(10.16,0) 10(10.16,2.54) 11(12.7,0) 12(12.7,2.54) 13(15.24,0) 14(15.24,2.54) 15(17.78,0) 16(17.78,2.54) 17(20.32,0) 18(20.32,2.54) 19(22.86,0) 20(22.86,2.54)
  silkscreen extent -1.27,-1.27 24.13,3.81
"MCP23017 QFN" [mm] "QFN, 28-Leads, Body 6,00x6,00mm, Pitch 0,65mm, Thermal Pad 3,93x3,93mm, IPC High Density"
  oval 1x0.3 smd: 1(-2.725,1.95) 2(-2.725,1.3) 3(-2.725,0.65) 4(-2.725,0) 5(-2.725,-0.65) 6(-2.725,-1.3) 7(-2.725,-1.95) 15(2.725,-1.95) 16(2.725,-1.3) 17(2.725,-0.65) 18(2.725,0) 19(2.725,0.65) 20(2.725,1.3) 21(2.725,1.95)
  oval 0.3x1 smd: 8(-1.95,-2.725) 9(-1.3,-2.725) 10(-0.65,-2.725) 11(0,-2.725) 12(0.65,-2.725) 13(1.3,-2.725) 14(1.95,-2.725) 22(1.95,2.725) 23(1.3,2.725) 24(0.65,2.725) 25(0,2.725) 26(-0.65,2.725) 27(-1.3,2.725) 28(-1.95,2.725)
  rect 3.93x3.93 smd: 29(0,0)
  silkscreen extent -3.92,-3.15 3.15,3.15, body extent -3,-3 3,3, height 0.9
PAD_CIRC_HOLE [mil]
  round 74 hole 39.4: 1(0,0)
QFN127P600-8N [mm]
  oval 0.85x0.25 smd: 1(-1.825,1) 2(-1.825,0.5) 3(-1.825,0) 4(-1.825,-0.5) 5(-1.825,-1) 11(1.825,-1) 12(1.825,-0.5) 13(1.825,0) 14(1.825,0.5) 15(1.825,1)
  oval 0.25x0.85 smd: 6(-1,-1.825) 7(-0.5,-1.825) 8(0,-1.825) 9(0.5,-1.825) 10(1,-1.825) 16(1,1.825) 17(0.5,1.825) 18(0,1.825) 19(-0.5,1.825) 20(-1,1.825)
  rect 2.3x2.3 smd: 21(0,0)
  silkscreen extent -2.97,-2.2 2.2,2.2, body extent -2.05,-2.05 2.05,2.05, height 0.8
R1005_0402i_L [mm] "Resistor, Chip; 1.00 mm L X 0.50 mm W X 0.40 mm H body"
  rrect50% 0.52x0.56 smd: 1(-0.44,0) 2(0.44,0)
  body extent -0.5,-0.25 0.5,0.25, height 0.4
R1608_0603I_L [mm] "Chip Resistor, 2-Leads, Body 1.57x0.85mm, IPC High Density"
  rect 0.7x0.85 smd: 1(-0.6,0) 2(0.6,0)
  body extent -0.82,-0.48 0.82,0.48, height 0.5
R2012_0805I_L [mm] "Chip Resistor, 2-Leads, Body 2.05x1.25mm, IPC High Density"
  rect 0.8x1.3 smd: 1(-0.85,0) 2(0.85,0)
  silkscreen extent -0.05,-0.55 0.05,0.55, body extent -1.1,-0.7 1.1,0.7, height 0.8
solderJumper [mil]
  rect 25x25 smd: 1(20,0) 2(-20,0)
  Top Layer region: 2.51,25 12.08,23.1 20.19,17.68 25.61,9.57 27.51,0 27.51,0 25.61,-9.57 20.19,-17.68 12.08,-23.1 2.51,-25 2.51,-25
  Top Layer region: -2.51,25 -12.08,23.1 -20.19,17.68 -25.61,9.57 -27.51,0 -27.51,0 -25.61,-9.57 -20.19,-17.68 -12.08,-23.1 -2.51,-25 -2.51,-25
TSOP95P280X110-6L [mm]
  rect 0.8x0.55 smd: 1(-1.25,0.95) 2(-1.25,0) 3(-1.25,-0.95) 4(1.25,-0.95) 5(1.25,0.95)
  silkscreen extent -1.37,-1.6 0.45,1.9, body extent -1.38,-1.6 1.38,1.6, height 1.1